# Allegro board GC3355 USB_pcb_V1.brd
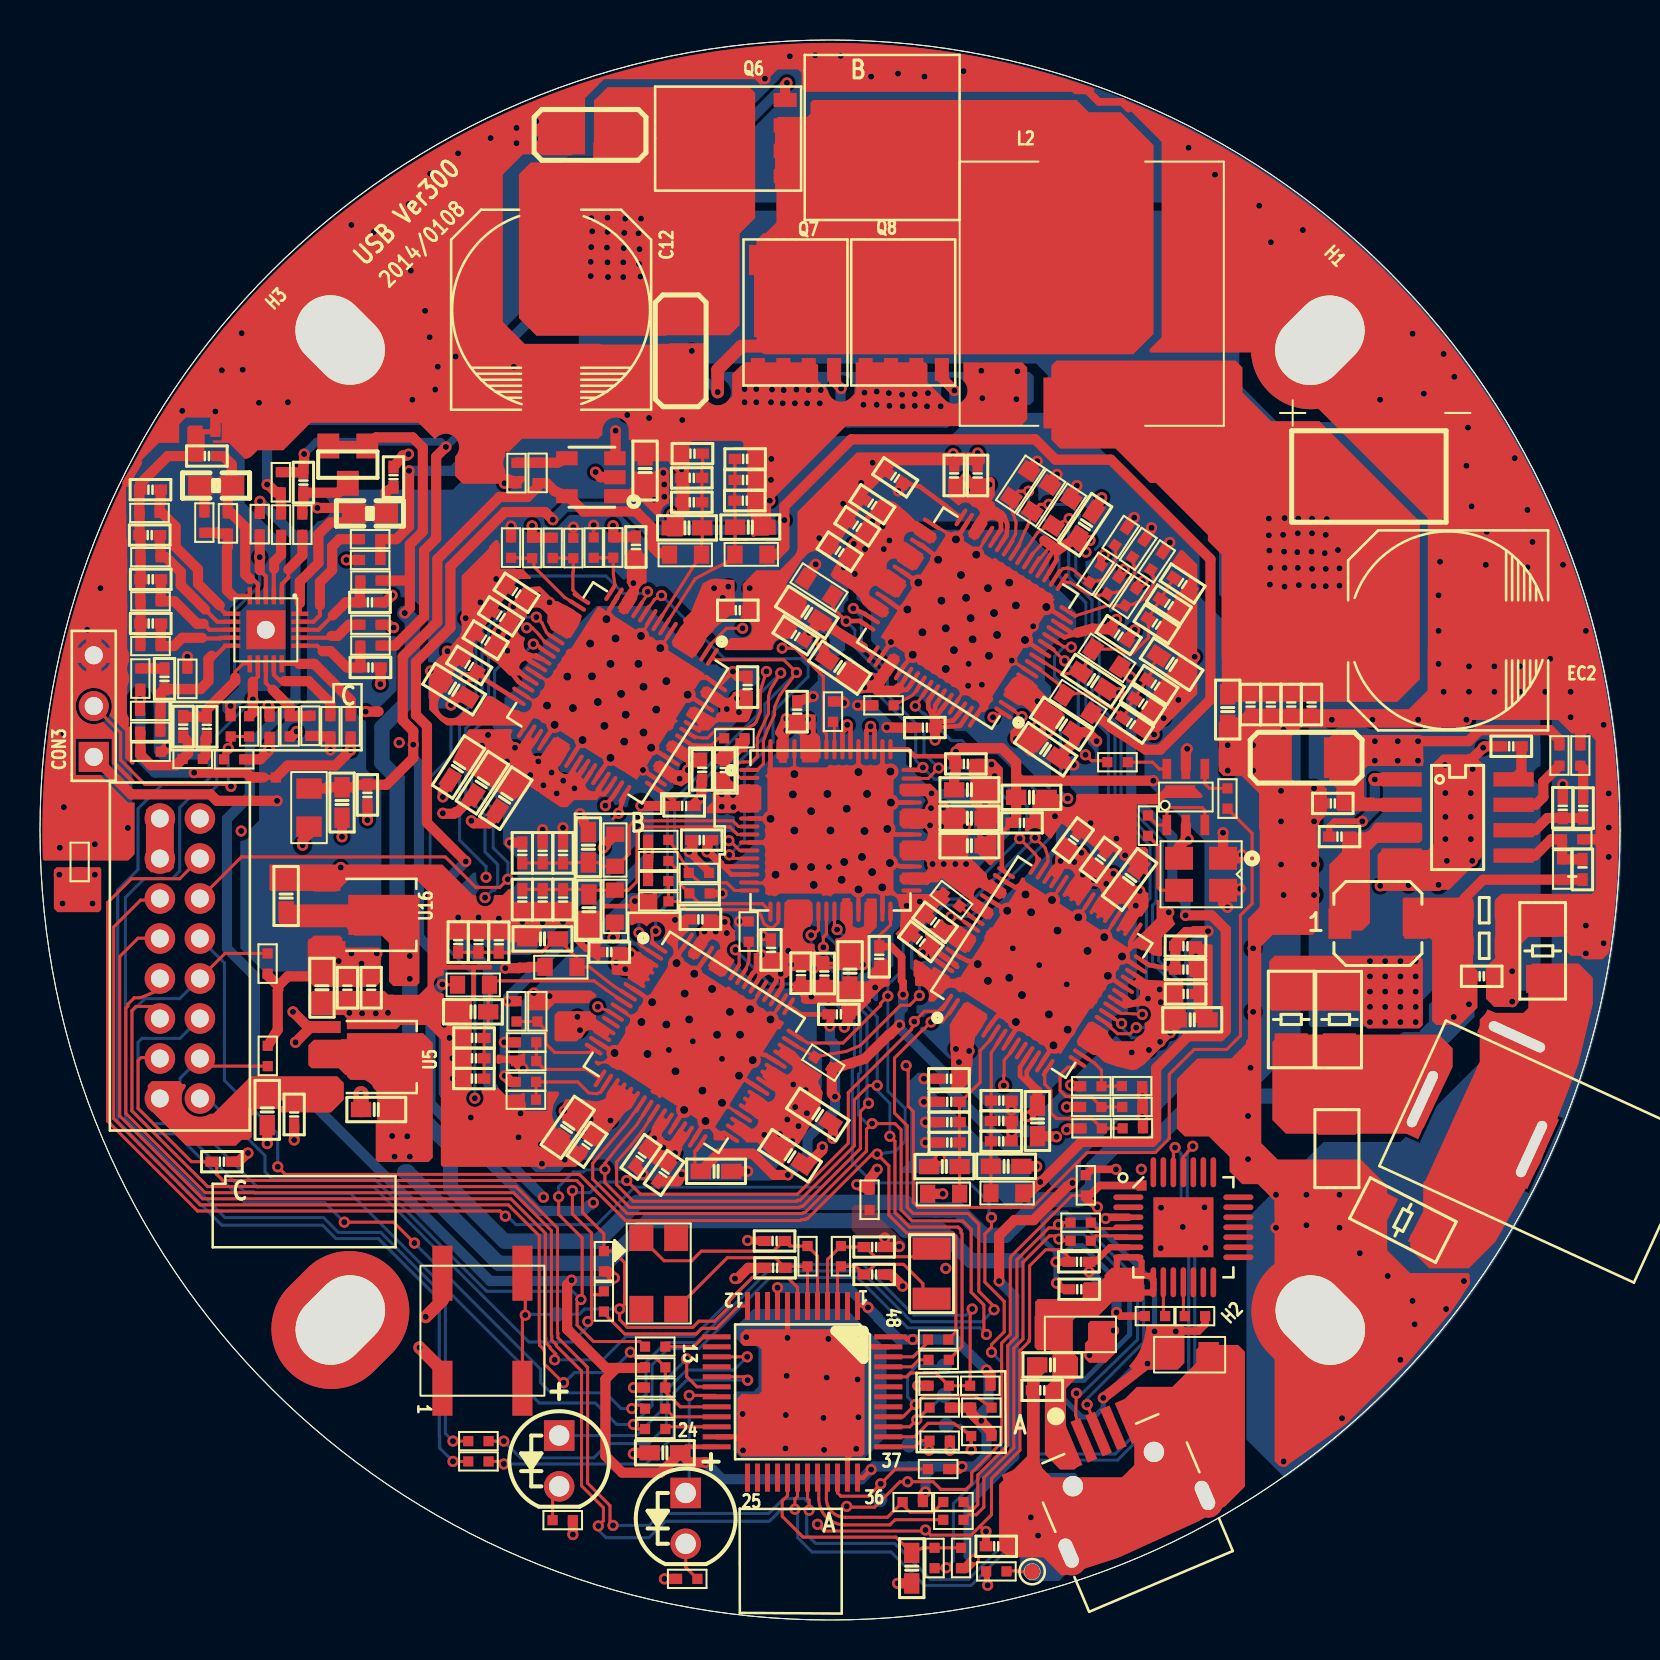
[diagram p0: board, top side]
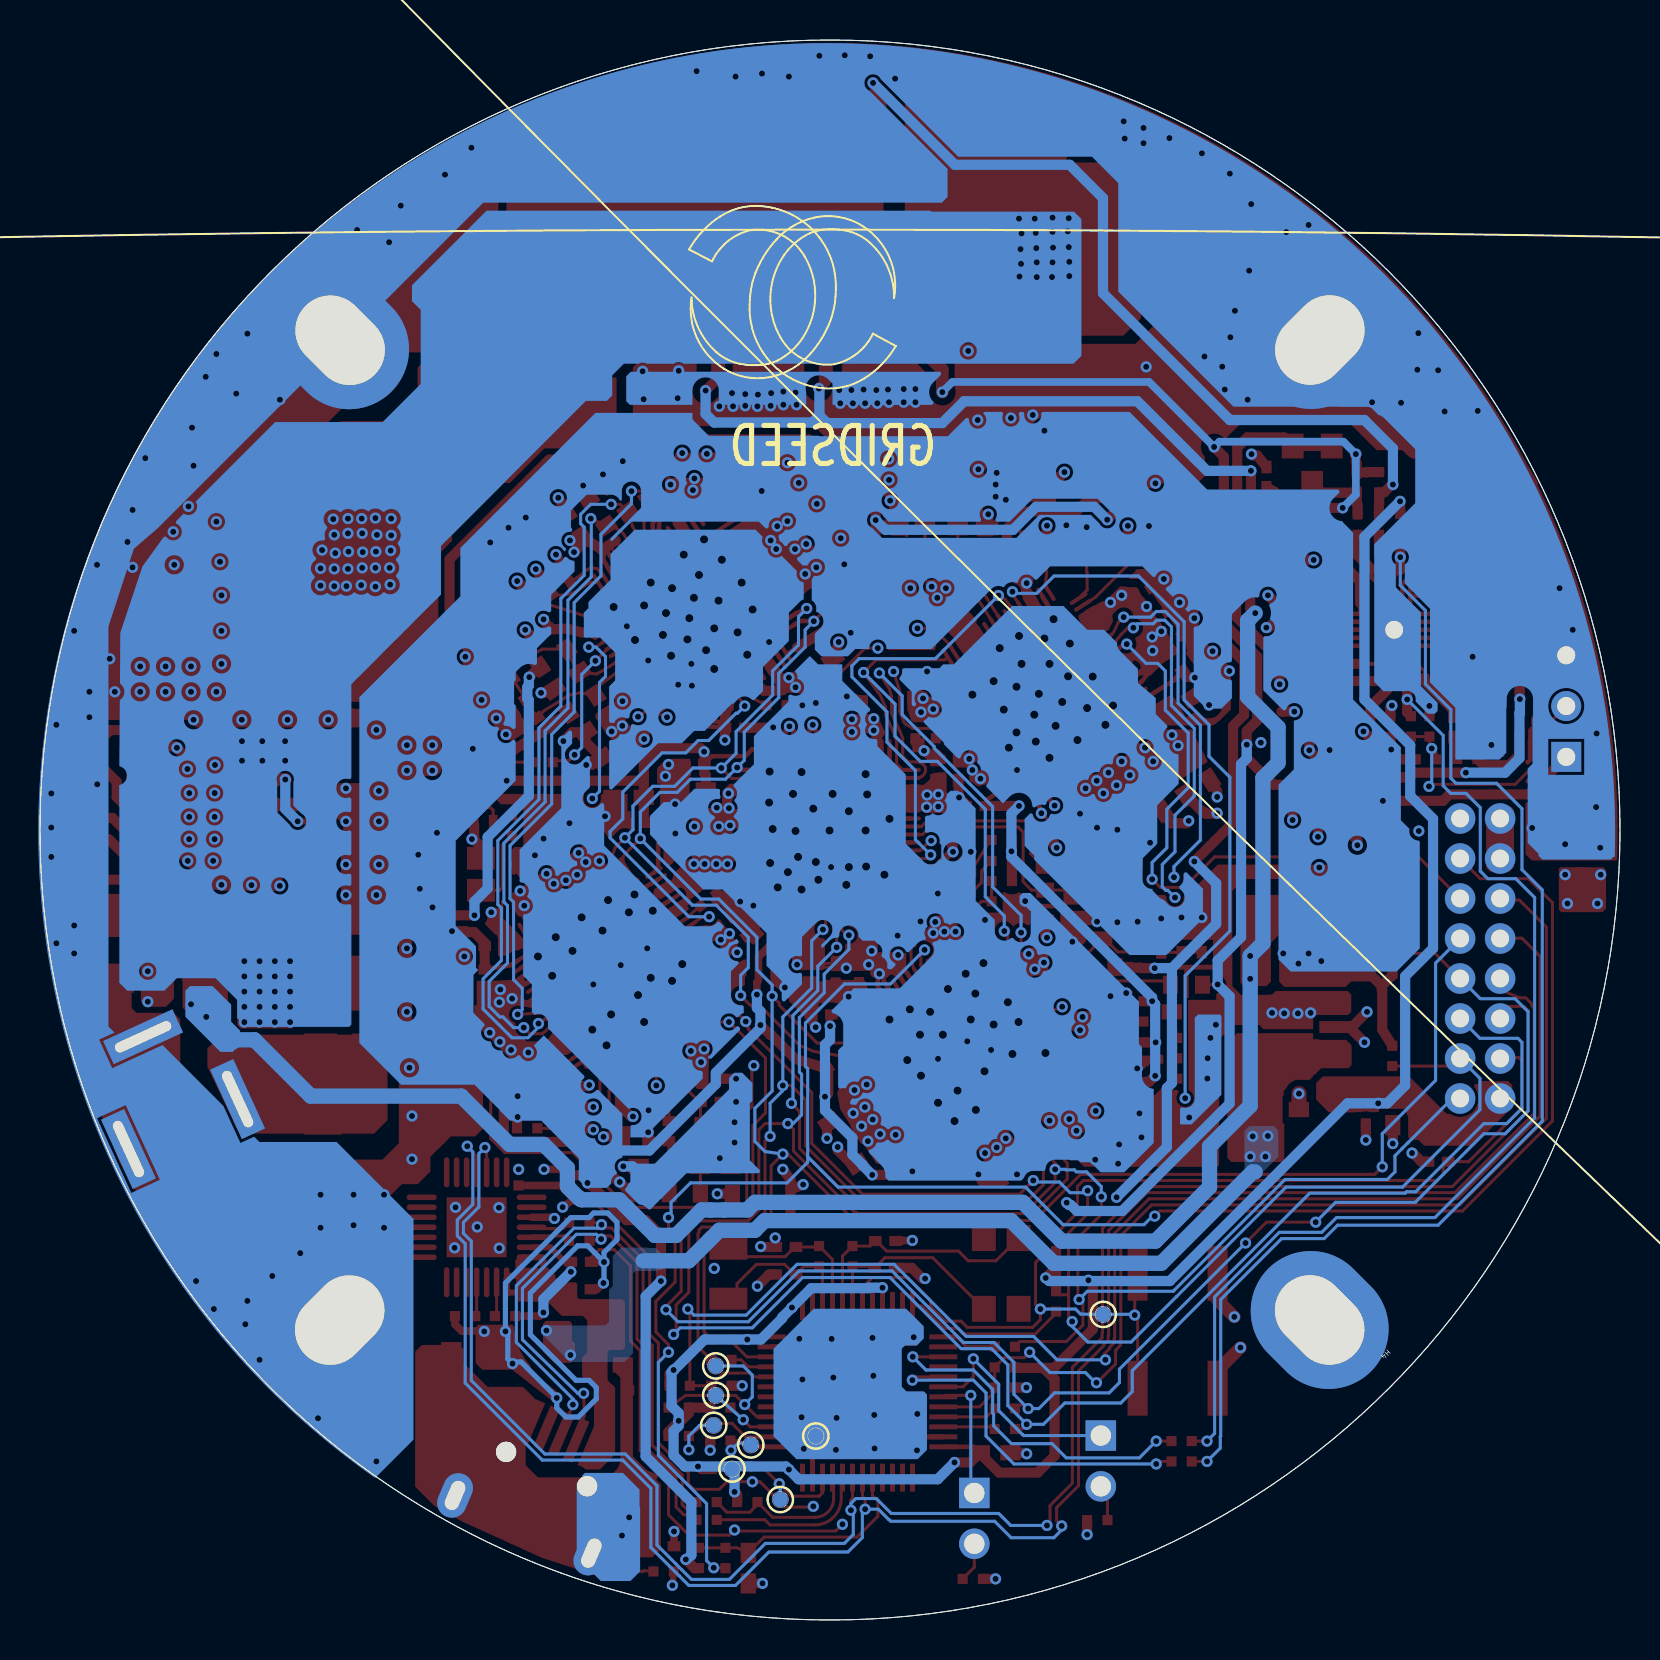
[diagram p1: board, bottom side, seen from below]

Outline 79 x 79 mm; copper layers: TOP, GND, VCC, BOTTOM. Coordinates in mm from the lower left corner of the outline.
Outline path: circle c39.5,39.5 r39.5 ; circle c39.5,39.5 r39.5

## Design rules (mm)
net group 4MIL: nets DGND

## Placement (name value [footprint] x y rotation side)
C8  0.1uF  [C0402]  13.17 56.87 90 top
C9  10uF/16v  [C1206]  27.5 74.26 180 top
C10  10uF/16v  [C1206]  32.04 63.46 270 top
C11  3.3n  [C0402]  17.68 57.14 90 top
C12  220uf/25v  [CES10]  25.56 65.51 270 top
C13  0.1uf  [C0402]  61.54 45.77 270 top
C14  10u/6.3V  [C0603]  59.39 45.52 270 top
C15  0.1uf  [C0402]  60.53 45.77 270 top
C16  1000pF  [C0402]  63.58 45.77 270 top
C17  1000pF  [C0402]  62.56 45.77 270 top
C18  22pF  [C0402]  41.71 18.65 180 top
C19  22pF  [C0402]  41.71 17.28 180 top
C20  22pF  [C0402]  36.75 17.61 0 top
C21  22pF  [C0402]  36.73 18.95 0 top
C22  4.7uF  [C0603]  11.36 25.51 270 top
C23  0.1uF  [C0402]  12.71 25.28 270 top
C24  4.7uF  [C0603]  31.24 8.36 180 top
C25  10u/6.3V  [C0603]  50.62 12.75 0 top
C29  4.7uF  [C0603]  16.82 25.52 180 top
C30  NC  [C0402]  31.21 22.36 55.2 top
C31  1u  [C0402]  16.52 47.63 0 top
C32  0.1uF  [C0402]  50.11 11.48 0 top
C33  0.1uF  [C0603]  43.59 2.59 270 top
C34  2.2nF  [C0402]  6.23 47.06 90 top
C35  20nF  [C0402]  8.34 58.2 0 top
C36  10n  [C0402]  8.34 44.66 90 top
C37  33P  [C0402]  7.16 44.67 270 top
C38  NC  [C0402]  5.52 56.52 0 top
C39  1uF  [C0402]  16.5 50.88 0 top
C40  NC  [C0402]  5.48 54.25 0 top
C41  NC  [C0402]  5.54 52.04 0 top
C42  220uF  [D-CASE-D4D]  66.44 57.18 0 top
C43  NC  [C0402]  5.54 49.83 0 top
C44  0.1uF  [C0402]  47.81 3.69 0 top
C88  43pF  [C0402]  55.77 46.75 326.9 top
C89  2.2uF  [C0603]  56.58 47.79 326.8 top
C90  10uF  [C0603]  38.34 50.39 147.3 top
C91  91pF  [C0402]  55.15 45.8 326.4 top
C92  22pF  [C0402]  54.55 44.82 326.1 top
C93  43pF  [C0402]  56.45 50.77 326.9 top
C94  2.2uF  [C0603]  52.66 46.97 326.6 top
C95  91pF  [C0402]  55.83 49.79 327 top
C96  22pF  [C0402]  57.13 51.82 326.8 top
C97  0.1uF  [C0402]  49.1 39.86 0 top
C107  0.1uF  [C0402]  42.76 57.13 146.4 top
C109  10uF  [C0603]  39.99 47.62 145.6 top
C110  10uF  [C0603]  51.08 44.81 326.3 top
C111  10uF  [C0603]  50.28 43.53 325.6 top
C112  0.1uF  [C0402]  41.62 55.79 146.7 top
C113  0.1uF  [C0402]  40.86 54.69 146.7 top
C114  0.1uF  [C0402]  45.71 57.23 90 top
C116  0.1uF  [C0402]  46.88 57.23 89.9 top
C117  0.1uF  [C0402]  39.98 53.42 146.6 top
C118  0.1uF  [C0402]  44.24 44.62 180.3 top
C119  10uF  [C0603]  52.27 54.77 56.5 top
C120  43pF  [C0402]  26.15 38.36 90 top
C121  0.1uF  [C0402]  9.09 22.91 0 top
C122  2.2uF  [C0603]  27.42 38.64 90 top
C123  10uF  [C0603]  46.47 41.51 0 top
C124  91pF  [C0402]  25.13 38.36 90 top
C125  22pF  [C0402]  24.12 38.36 90 top
C126  43pF  [C0402]  25.13 36.02 270 top
C128  2.2uF  [C0603]  27.45 35.51 270 top
C129  91pF  [C0402]  26.15 36.02 270 top
C130  22pF  [C0402]  24.12 36.02 270 top
C131  0.1uF  [C0402]  41.96 33.16 270 top
C132  0.1uF  [C0402]  46.29 42.8 0 top
C133  10uF  [C0603]  46.47 40.09 0 top
C134  10uF  [C0603]  46.47 38.72 0 top
C135  10uF  [C0603]  40.5 32.44 270 top
C136  0.1uF  [C0402]  53.93 49.25 326.9 top
C137  0.1uF  [C0402]  34.24 42.5 90 top
C138  0.1uF  [C0402]  33.08 38.99 180 top
C139  0.1uF  [C0402]  39.22 32.32 270 top
C140  0.1uF  [C0402]  38.05 32.34 270 top
C141  0.1uF  [C0402]  37.86 45.42 90 top
C143  43pF  [C0402]  35.26 58.06 0.1 top
C144  2.2uF  [C0603]  35.52 54.64 0.1 top
C145  10uF  [C0603]  20.71 46.54 148.5 top
C146  91pF  [C0402]  35.24 55.97 0.1 top
C147  22pF  [C0402]  35.25 57 0.1 top
C148  43pF  [C0402]  32.59 55.89 180.1 top
C149  2.2uF  [C0603]  32.35 54.61 180 top
C150  91pF  [C0402]  32.62 58.32 180 top
C151  22pF  [C0402]  32.59 57.11 180.3 top
C152  0.1uF  [C0402]  32.21 40.7 359.8 top
C153  0.1uF  [C0402]  21.46 47.73 148.4 top
C154  10uF  [C0603]  20.93 42.65 237 top
C155  10uF  [C0603]  22.11 41.87 237 top
C156  10uF  [C0603]  23.28 41.09 237 top
C157  0.1uF  [C0402]  33.11 42.51 269.9 top
C158  0.1uF  [C0402]  23.04 50.18 147.1 top
C159  0.1uF  [C0402]  22.28 49 148.4 top
C160  0.1uF  [C0402]  23.83 51.36 146.7 top
C161  0.1uF  [C0402]  35.38 46.65 89.9 top
C162  0.1uF  [C0402]  34.89 50.49 0.1 top
C163  0.47uF  [C0402]  16.56 31.61 90 top
C164  43pF  [C0402]  45.46 24.89 180.1 top
C174  2.2uF  [C0603]  45.22 22.67 180.1 top
C175  10uF  [C0603]  49.57 41.13 359.9 top
C176  91pF  [C0402]  45.47 23.88 180.1 top
C177  22pF  [C0402]  45.46 25.91 180.1 top
C178  43pF  [C0402]  48.06 23.94 359.9 top
C179  2.2uF  [C0603]  48.31 22.68 359.9 top
C180  91pF  [C0402]  48.06 24.95 359.9 top
C181  22pF  [C0402]  48.06 25.97 359.9 top
C182  0.1uF  [C0402]  57.27 32.52 359.8 top
C183  0.1uF  [C0402]  57.27 33.69 359.6 top
C184  10uF  [C0603]  54.49 37.03 53.6 top
C185  10uF  [C0603]  57.61 30.01 0.1 top
C186  10uF  [C0603]  49.87 24.95 270 top
C187  0.1uF  [C0402]  45.45 27.06 180.1 top
C188  0.1uF  [C0402]  44.76 34.88 143.2 top
C195  0.1uF  [C0402]  44.04 33.93 143 top
C196  0.1uF  [C0402]  51.66 38.99 53.6 top
C197  0.1uF  [C0402]  53.02 38.03 53.6 top
C198  0.1uF  [C0402]  57.28 31.3 360 top
C199  10nF  [C0402]  64.97 39.17 0 top
C200  15pF  [C0402]  77.12 37.53 270 top
C201  22uF  [C0805]  72.21 33.71 0 top
C202  0.1uF  [C0402]  73.56 43.68 180 top
C203  22uF  [C0805]  72.21 35.49 0 top
C204  0.1uF  [C0402]  72.09 32.19 0 top
C205  22uF  [C1206]  63.31 43.12 0 top
C206  0.1uF  [C0402]  64.64 40.83 180 top
C207  3.9nF  [C0402]  77.16 40.6 90 top
C210  NC  [C0402]  76.14 40.61 90 top
C263  43pF  [C0402]  21.93 33.89 89.8 top
C264  2.2uF  [C0603]  25.12 34.05 179.9 top
C265  10uF  [C0603]  33.8 22.43 359.9 top
C266  91pF  [C0402]  22.94 33.89 89.8 top
C267  22pF  [C0402]  20.91 33.9 89.8 top
C268  43pF  [C0402]  21.7 28.09 179.8 top
C269  2.2uF  [C0603]  21.65 30.41 179.8 top
C270  91pF  [C0402]  21.7 29.1 179.8 top
C271  22pF  [C0402]  21.7 27.07 179.8 top
C272  0.1uF  [C0402]  39.94 30.28 0 top
C273  0.1uF  [C0402]  37.78 49.23 147.5 top
C274  10uF  [C0603]  26.38 24.63 235.4 top
C275  10uF  [C0603]  38.89 25.28 326.8 top
C276  10uF  [C0603]  37.5 23.21 326.8 top
C277  0.1uF  [C0402]  33.02 35.03 180 top
C278  0.1uF  [C0402]  28.47 33.39 179.8 top
C279  0.1uF  [C0402]  29.8 53.65 90.1 top
C280  0.1uF  [C0402]  27.35 23.76 234.9 top
C281  0.1uF  [C0402]  36.55 33.51 90 top
C282  0.1uF  [C0402]  30.05 23.16 234.9 top
C283  4.7U-06  [C0603]  30.25 57.47 90 top
C291  10uF  [C0603]  14.1 31.61 270 top
C292  0.1uF  [C0402]  15.37 31.61 270 top
C293  10uF  [C0603]  12.31 36.2 90 top
C294  1uF  [C0402]  51.95 17.91 180 top
C295  10uF  [C0603]  15.1 40.87 270 top
C296  0.1uF  [C0402]  16.37 41.26 270 top
C297  1uF  [C0402]  51.96 16.54 180 top
CON2  8pin  [CON8X2-2M0]  5.99 33.07 90 top
CON3  3pin  [HEADER3PIN]  2.69 43.16 90 top
D2  BAT54C/SOT  [SOT23-3]  15.39 57.77 180 top
EC2  1500u/6.3V  [CES10]  70.41 49.48 0 top
FB22  300ohm@100MHz,1.5A  [FB0805]  13.45 40.62 270 top
FB23  300ohm@100MHz,3A  [R1206]  64.97 30.03 90 top
FB24  300ohm@100MHz,3A  [R1206]  62.56 30.03 90 top
FB25  300ohm@100MHz,1.5A  [FB0805]  52.02 14.28 0 top
FB26  300ohm@100MHz,1.5A  [FB0805]  57.48 13.27 180 top
FB27  300ohm@100MHz,3A  [R1206]  75.13 33.46 270 top
FB28  300ohm@100MHz,3A  [R1206]  68.15 19.99 332.9 top
GND  T_POINT_R  [TP0M5C]  40.21 9.2 180 bottom
H1  hole  [THC6M0D3M5]  64 63.99 315 top
H2  hole  [THC6M0D3M5]  64.01 15 45 top
H3  hole  [THC6M0D3M5]  15.01 64 45 top
H4  hole  [THC6M0D3M5]  15.02 15 315 bottom
J1  SMCB-056508LB  [USB_MN5-004]  53.67 7.55 202.9 top
J2  DS-008  [DS-0008]  72.85 26.98 335.4 top
JTCK  T_POINT_R  [TP0M5C]  43.46 8.75 0 bottom
JTDI  T_POINT_R  [TP0M5C]  45.31 9.73 0 bottom
JTDO  T_POINT_R  [TP0M5C]  45.21 11.23 0 bottom
JTMS  T_POINT_R  [TP0M5C]  41.99 6.02 180 bottom
L2  1u  [LS2_1335]  52.59 66.32 270 top
L3  1uH_3A  [CHOKE_40]  66.9 34.82 0 top
LED2  -  [LED]  25.96 7.95 0 top
LED3  -  [LED]  32.28 5.08 0 top
M1  GC3355  [QFN24_4X4MM_SLUG]  46.38 50.09 147.3 top
M2  GC3355  [QFN24_4X4MM_SLUG]  39.52 39.48 0 top
M3  GC3355  [QFN24_4X4MM_SLUG]  28.88 46.36 237.5 top
M4  GC3355  [QFN24_4X4MM_SLUG]  50.09 32.64 57.2 top
M5  GC3355  [QFN24_4X4MM_SLUG]  32.72 28.88 327.4 top
NJTRST  T_POINT_R  [TP0M5C]  45.21 12.7 0 bottom
Q6  09N03  [LFPAK]  34.46 74.07 180 top
Q7  09N03  [LFPAK]  37.78 65.33 90 top
Q8  09N03  [LFPAK]  43.16 65.33 90 top
R1  1R  [RC0603]  51.89 45.8 146.8 top
R2  1R  [RC0603]  53.33 48.1 146.5 top
R8  2.2  [R0603]  16.5 55.33 0 top
R9  681R  [R0402]  16.52 48.72 180 top
R10  0  [R0402]  13.12 54.77 270 top
R14  0  [R0402]  12.05 54.77 90 top
R15  0  [R0402]  16.51 54.04 0 top
R21  1k  [R0402]  26.14 4.99 0 top
R22  1k  [R0402]  32.36 2.06 180 top
R23  0r  [R0402]  30.76 13.67 0 top
R24  0r  [R0402]  28.19 15.93 270 top
R25  0r  [R0402]  30.76 9.55 0 top
R26  0r  [R0402]  30.76 10.57 0 top
R27  0r  [R0402]  44.91 14.02 0 top
R28  0r  [R0402]  44.93 13.01 0 top
R29  100R  [R0402]  44.73 3.1 270 top
R30  10K  [R0402]  46.05 3.1 90 top
R32  1M  [R0402]  40.05 18.19 270 top
R33  10K  [R0402]  28.19 17.94 270 top
R34  NC  [R0402]  47.02 11.71 0 top
R35  10K  [R0402]  44.93 11.71 180 top
R36  3K  [R0402]  15.53 44.68 270 top
R37  1M  [R0402]  38.38 18.19 90 top
R38  10K  [R0402]  47.07 10.62 180 top
R39  10K  [R0402]  44.98 10.62 0 top
R40  10K  [R0402]  47.07 9.2 0 top
R41  0  [R0402]  9.4 54.83 90 top
R42  20K  [R0402]  7.63 43.05 180 top
R43  NC  [R0402]  7.37 47.06 90 top
R44  RS  [R-0402_S]  11.29 42.13 0 top
R45  2K  [R0402]  5.51 45.46 180 top
R46  0R  [R-0402_S]  8.27 59.41 0 top
R47  10K  [R0402]  44.91 7.55 0 top
R48  100K  [R0402]  10.99 54.79 270 top
R49  10K  [R0402]  47.82 2.43 0 top
R50  33k  [R0402]  16.52 49.76 180 top
R51  10K  [R0402]  44.98 8.97 180 top
R52  0  [R0402]  5.02 47.07 270 top
R53  2.2K  [RC0603]  50.06 56.09 236.6 top
R54  2.2K  [RC0603]  51.12 55.38 236.6 top
R55  1R  [RC0603]  28.77 38.49 270 top
R56  1R  [RC0603]  28.74 35.69 90 top
R57  10K  [R0402]  30.76 12.63 180 top
R58  NC  [R0402]  5.51 44.41 0 top
R59  0  [R0402]  5.53 43.41 0 top
R60  10K  [R0402]  30.76 11.62 180 top
R61  1R  [RC0603]  35.55 53.27 180.1 top
R62  1R  [RC0603]  32.28 53.27 0.1 top
R63  30k  [R0402]  5.53 50.93 180 top
R64  33k  [R0402]  5.53 53.14 180 top
R65  2.2  [R0402]  16.52 51.97 180 top
R66  36k  [R0402]  5.47 55.35 180 top
R67  1R  [RC0603]  45.18 21.31 0.1 top
R68  1R  [RC0603]  48.34 21.34 179.9 top
R69  nc  [R0402]  54.04 54.15 56.6 top
R70  nc  [R0402]  54.91 53.56 55.7 top
R71  nc  [R0402]  55.83 52.93 56 top
R72  4.7k  [R0402]  52.77 52.31 236.5 top
R73  1R  [RC0603]  26.05 32.65 0 top
R74  1R  [RC0603]  21.68 31.76 0 top
R75  4.7k  [R0402]  53.65 51.73 235.6 top
R76  4.7k  [R0402]  54.54 51.14 236.6 top
R77  nc  [R0402]  30.91 37.95 180.1 top
R78  100k  [R0402]  11.39 28.2 90 top
R79  100k  [R0402]  11.38 32.82 270 top
R80  0r  [R0402]  21.92 7.93 180 top
R81  4.7k  [R0402]  30.91 39.01 180 top
R82  4.7k  [R0402]  30.91 35.93 0 top
R83  4.7k  [R0402]  32.98 36.33 179.9 top
R84  nc  [R0402]  32.95 37.35 180 top
R85  0r  [R0402]  21.92 8.94 180 top
R86  10K  [R0402]  55.75 15.2 0 top
R87  nc  [R0402]  30.91 36.95 180 top
R88  4.7k  [R0402]  26.67 53.6 90 top
R89  nc  [R0402]  27.68 53.62 90 top
R90  4.7k  [R0402]  24.61 53.6 270.1 top
R93  nc  [R0402]  25.64 53.61 269.9 top
R94  4.7k  [R0402]  28.67 53.62 269.9 top
R95  nc  [R0402]  23.55 53.62 90 top
R96  4.7k  [R0402]  54.62 25.65 0.1 top
R97  2.2K  [RC0603]  49.02 56.78 236.4 top
R98  2.2K  [RC0603]  38.97 51.63 327.1 top
R99  4.7k  [R0402]  42.18 45.73 180 top
R100  4.7k  [R0402]  54.64 24.59 0 top
R101  4.7k  [R0402]  52.57 26.69 360 top
R102  nc  [R0402]  52.56 25.65 359.9 top
R103  nc  [R0402]  52.58 24.58 0 top
R104  nc  [R0402]  54.6 26.7 360 top
R105  10K  [R0402]  39.17 27.87 327 top
R106  10K  [R0402]  57.75 15.19 180 top
R107  4.7k  [R0402]  39.65 45.42 90 top
R108  4.7k  [R0402]  34.72 44.09 0.1 top
R109  4.7k  [R0402]  45.57 36.01 142.7 top
R110  4.7k  [R0402]  35.43 34.42 90 top
R113  100K  [R0402]  75.97 43.22 270 top
R115  NC  [R-0603]  8.8 56.72 0 top
R116  NC  [R0402]  8.22 54.87 90 top
R117  NC  [R0402]  12.04 56.89 90 top
R118  NC  [R0402]  16.51 53 180 top
R119  40.2K_1%  [R0402]  76.11 37.53 90 top
R120  nc  [R0402]  24.31 28.88 180 top
R121  nc  [R0402]  23.83 30.43 90 top
R122  nc  [R0402]  24.3 26.02 0 top
R123  4.7k  [R0402]  24.31 27.94 0 top
R124  4.7k  [R0402]  24.87 30.43 270 top
R125  4.7k  [R0402]  24.3 26.9 180 top
R126  10k 1%  [R0402]  76.61 39.03 0 top
R127  10k  [R0402]  77.02 43.22 270 top
R139  27k  [R0402]  5.53 48.7 180 top
R183  22R  [R0402]  45.67 5.01 0 top
R184  22R  [R0402]  45.67 5.9 0 top
R185  1.5k  [R0402]  43.64 5.9 180 top
R186  0R  [R0402]  1.98 37.9 90 top
R187  0R  [R0402]  41.48 21.01 90 top
R188  0R  [R0402]  52.29 21.73 90 top
R189  22R  [R0402]  52.03 18.96 180 top
R190  22R  [R0402]  52.03 19.87 180 top
R211  3.65k-1-04  [R0402]  24.88 57.36 90 top
R212  10k-1-04  [R0402]  23.82 57.34 270 top
R330  1K  [R0402]  14.52 44.68 90 top
R331  10K  [R0402]  11.48 44.67 270 top
R332  1K  [R0402]  12.49 44.68 90 top
R333  nc  [R0402]  13.52 44.71 270 top
R336  1K  [R0402]  10.45 44.68 270 top
R337  nc  [R0402]  9.7 43.03 0 top
R338  nc  [R0402]  9.53 44.68 270 top
R343  0R  [R0402]  53.87 42.89 0 top
R344  0R  [R0402]  59.37 41.07 90 top
R345  0R  [R0402]  55.4 39.72 270 top
RST  T_POINT_R  [TP0M5C]  25.84 15.28 180 bottom
RTCK  T_POINT_R  [TP0M5C]  49.61 2.42 0 top
SW100  B3SL  [SW_B3SL-1022P]  22.12 14.46 270 top
T1  FANS  [SMD3215]  64.85 23.57 90 top
U1  GD32F103C8  [QFPS48_0D5_1D6]  38.13 11.41 180 top
U2  uP1509  [QFN3X3-20-0-4]  11.29 49.51 270 top
U3  cp2102  [QFN28-CP2102]  57.17 19.64 0 top
U5  AME8805AFET  [SOT_89_M]  16.14 28.15 0 top
U7  UP1707Q  [PSOP8]  68.08 42.03 0 top
U9  UP0111  [SOT23_5]  27.55 57.14 90 top
U16  AME8805AFET  [SOT_89_M]  16.12 35.26 0 top
U29  74HC2GU04  [SOT23-6]  57.29 41.15 0 top
VCC3V3  T_POINT_R  [TP0M5C]  44.4 7.55 180 bottom
X6  25M  [XTAL4_3P2X2P5_SMD]  58.05 37.29 180 top
Y2  32.768K  [SMD3215]  44.58 17.32 90 top
Y3  8M  [XS4_3225_1D0]  30.94 17.33 270 top

## Library data of the parts
C8 C11 C30 C31 C34-C43 = C0603
C9 C10 C13-C17 C25 = C0805
C12 EC2 = EC10
C18-C21 C23 C32 C44 = CAP-NP0603_0
C22 C24 C29 C33 = CAP-NP0805_0
C88-C97 C107 C109-C114 C116-C120 C122-C126 C128-C141 C143-C162 C164 C174-C188 C195-C198 C263-C282 C291-C297 = CAP_NP
C121 = 1uFCapacitor10V10%0402
C163 = CAP NP_0
C199-C207 C210 = CAP NP
C283 = C_2
CON2 = CON_DIP36_8
CON3 = CON_DIP36_6
D2 = BAT54C/SOT_7
FB22-FB28 = FERRITE BEAD: room: OCD_MICJACK
GND JTCK JTDI JTDO JTMS NJTRST RST RTCK VCC3V3 = T_POINT_R
H1-H4 = Z_0
J1 = MIRCOUSB-9_0
J2 = DC-33_2
L2 = Inductor_Ring_Cube_0
L3 = CHOKE RF
LED2 LED3 = LED_2
M1-M5 = LAN8720A-QFN24_1
Q6-Q8 = NMOS_D_PPAK_2
R1 R2 R53-R56 R61 R62 R67-R77 R81-R84 R87-R90 R93-R105 R107-R110 R120-R125 = RES: tolerance: 5%
R8-R10 R14 R15 R36 R41-R43 R45 R48 R50 R52 R58 R59 R63-R66 R115-R118 R139 = R0603
R21-R30 R32-R35 R37-R40 R47 R49 R51 R57 R60 R78-R80 R85 R86 R106 = R0603_0
R44 R46 = RS
R113 R119 R126 R127 R330-R333 R336-R338 R343-R345 = R
R183-R190 = R1005_0
R211 R212 = R_10
SW100 = Switch_Pushbuttonsmd
T1 Y2 = CRYSTAL_0
U1 = VC0355TLN_1
U2 = uP6203_QFN24_1
U3 = uP6203_QFN24_0
U5 = AME8805AEFT_0
U7 = MP1497_3
U9 = SN74AHCT1G125_0: room: OCD_CRT
U16 = FLASHMP3_5
U29 = PCF8574_P_0
X6 = SMD2520
Y3 = CRYSTAL_1

## Footprints (pads in the part's own frame, mm; a bottom-side part is the same pattern mirrored in y, then rotated)
C0402
  rect 0.635x0.508 smd: 1(-0.508,0) 2(0.508,0)
C0603
  rect 1.016x0.762 smd: 1(-0.762,0) 2(0.762,0)
C0805
  oval 0.889x1.524 smd: 1(-0.965,0) 2(0.965,0)
C1206
  rect 1.524x2.032 smd: 1(-1.651,0) 2(1.651,0)
CES10
  rect 4.4x2.6 smd: 1(-4.2,0) 2(4.2,0)
CHOKE_40
  rect 1.143x1.524 smd: 1(-1.9,0) 2(1.9,0)
CON8X2-2M0
  round 1.524 hole 0.889: 1(-7,0) 2(-5,0) 3(-3,0) 4(-1,0) 5(1,0) 6(3,0) 7(5,0) 8(7,0) 9(-7,-2) 10(-5,-2) 11(-3,-2) 12(-1,-2) 13(1,-2) 14(3,-2) 15(5,-2) 16(7,-2)
D-CASE-D4D
  rect 1.829x2.845 smd: 1(-3.861,0) 2(3.861,0)
DS-0008
  rect 1.27x3.81 hole 0.508x3.048: 1(-3,-2.4) 2(3,-2.4)
  rect 3.81x1.27 hole 3.048x0.508: 3(0,2.4)
FB0805
  rect 1.016x1.27 smd: 1(-0.953,0) 2(0.953,0)
HEADER3PIN
  rect 1.5x1.5 hole 0.9: 1(0,0)
  round 1.5 hole 0.9: 2(2.54,0) 3(5.08,0)
LED
  rect 1.524x1.524 hole 1.016: A(0,1.27)
  round 1.524 hole 1.016: K(0,-1.27)
LFPAK
  rect 1.15x0.7 smd: 1(-2.801,1.88) 2(-2.801,0.61) 3(-2.801,-0.66) 4(-2.801,-1.93)
  rect 3.1x4.2 smd: 5(0.374,-0.025)
  rect 1.5x4.7 smd: 6(2.674,-0.025)
LS2_1335
  rect 2.54x4.826 smd: 1(-5.461,0) 2(5.461,0)
PSOP8
  rect 2.007x0.711 smd: 1(0,0) 2(0,-1.27) 3(0,-2.54) 4(0,-3.81) 5(5.6,-3.81) 6(5.6,-2.54) 7(5.6,-1.27) 8(5.6,0)
  rect 2.007x3.023 smd: 9(2.8,-1.9)
QFN3X3-20-0-4
  rect 0.85x0.225 smd: 1(-1.702,0.8) 2(-1.702,0.4) 3(-1.702,0) 4(-1.702,-0.4) 5(-1.702,-0.8) 11(1.702,-0.8) 12(1.702,-0.4) 13(1.702,0) 14(1.702,0.4) 15(1.702,0.8)
  rect 0.225x0.85 smd: 6(-0.8,-1.702) 7(-0.4,-1.702) 8(0,-1.702) 9(0.4,-1.702) 10(0.8,-1.702) 16(0.8,1.702) 17(0.4,1.702) 18(0,1.702) 19(-0.4,1.702) 20(-0.8,1.702)
  rect 1.575x1.575 hole 0.889: 21(0,0)
QFN24_4X4MM_SLUG
  oval 1.016x0.203 smd: 1(-4.06,3.03) 2(-4.06,2.63) 3(-4.06,2.2) 4(-4.06,1.8) 5(-4.06,1.4) 6(-4.06,1) 7(-4.06,0.6) 8(-4.06,0.2) 9(-4.06,-0.2) 10(-4.06,-0.6) 11(-4.06,-1) 12(-4.06,-1.4) 13(-4.06,-1.8) 14(-4.06,-2.2) 15(-4.06,-2.6) 16(-4.06,-3) 33(4.06,-3) 34(4.06,-2.6) 35(4.06,-2.2) 36(4.06,-1.8) 37(4.06,-1.4) 38(4.06,-1) 39(4.06,-0.6) 40(4.06,-0.2) 41(4.06,0.2) 42(4.06,0.6) 43(4.06,1) 44(4.06,1.4) 45(4.06,1.8) 46(4.06,2.2) 47(4.06,2.6) 48(4.06,3.03)
  oval 0.203x1.016 smd: 17(-3,-4.06) 18(-2.6,-4.06) 19(-2.2,-4.06) 20(-1.8,-4.06) 21(-1.4,-4.06) 22(-1,-4.06) 23(-0.6,-4.06) 24(-0.2,-4.06) 25(0.2,-4.06) 26(0.6,-4.06) 27(1,-4.06) 28(1.4,-4.06) 29(1.8,-4.06) 30(2.2,-4.06) 31(2.6,-4.06) 32(3,-4.06) 49(3,4.06) 50(2.6,4.06) 51(2.2,4.06) 52(1.8,4.06) 53(1.4,4.06) 54(1,4.06) 55(0.6,4.06) 56(0.2,4.06) 57(-0.2,4.06) 58(-0.6,4.06) 59(-1,4.06) 60(-1.4,4.06) 61(-1.8,4.06) 62(-2.2,4.06) 63(-2.6,4.06) 64(-3,4.06)
  rect 6.299x6.299 smd: 65(0,0)
QFN28-CP2102
  oval 1.5x0.28 smd: 1(-2.75,1.5) 2(-2.75,1) 3(-2.75,0.5) 4(-2.75,0) 5(-2.75,-0.5) 6(-2.75,-1) 7(-2.75,-1.5) 15(2.75,-1.5) 16(2.75,-1) 17(2.75,-0.5) 18(2.75,0) 19(2.75,0.5) 20(2.75,1) 21(2.75,1.5)
  oval 0.28x1.5 smd: 8(-1.5,-2.75) 9(-1,-2.75) 10(-0.5,-2.75) 11(0,-2.75) 12(0.5,-2.75) 13(1,-2.75) 14(1.5,-2.75) 22(1.5,2.75) 23(1,2.75) 24(0.5,2.75) 25(0,2.75) 26(-0.5,2.75) 27(-1,2.75) 28(-1.5,2.75)
  rect 3x3 smd: 29(0,0)
  rect 0.508x0.508 smd: 30(-2.09,2.09)
QFPS48_0D5_1D6
  rect 0.25x1.4 smd: 1(-2.75,-4.29) 2(-2.25,-4.29) 3(-1.75,-4.29) 4(-1.25,-4.29) 5(-0.75,-4.29) 6(-0.25,-4.29) 7(0.25,-4.29) 8(0.75,-4.29) 9(1.25,-4.29) 10(1.75,-4.29) 11(2.25,-4.29) 12(2.75,-4.29) 25(2.75,4.29) 26(2.25,4.29) 27(1.75,4.29) 28(1.25,4.29) 29(0.75,4.29) 30(0.25,4.29) 31(-0.25,4.29) 32(-0.75,4.29) 33(-1.25,4.29) 34(-1.75,4.29) 35(-2.25,4.29) 36(-2.75,4.29)
  rect 1.4x0.25 smd: 13(4.29,-2.75) 14(4.29,-2.25) 15(4.29,-1.75) 16(4.29,-1.25) 17(4.29,-0.75) 18(4.29,-0.25) 19(4.29,0.25) 20(4.29,0.75) 21(4.29,1.25) 22(4.29,1.75) 23(4.29,2.25) 24(4.29,2.75) 37(-4.29,2.75) 38(-4.29,2.25) 39(-4.29,1.75) 40(-4.29,1.25) 41(-4.29,0.75) 42(-4.29,0.25) 43(-4.29,-0.25) 44(-4.29,-0.75) 45(-4.29,-1.25) 46(-4.29,-1.75) 47(-4.29,-2.25) 48(-4.29,-2.75)
R0402
  rect 0.508x0.508 smd: 1(-0.508,0) 2(0.508,0)
R0603
  rect 1.219x0.965 smd: 1(-0.787,0) 2(0.787,0)
R1206
  rect 1.397x1.651 smd: 1(-1.397,0) 2(1.397,0)
R-0402_S
  custom 1.27x0.508 smd: 1(-0.119,0)
  rect 0.508x0.508 smd: 2(0.5,0)
R-0603
  rect 1.219x0.965 smd: 1(-0.787,0) 2(0.787,0)
RC0603
  rect 0.76x0.9 smd: 1(-0.8,0) 2(0.8,0)
SMD3215
  rect 1.1x1.9 smd: 1(-1.25,0) 2(1.25,0)
SOT23-3
  rect 1.092x1.245 smd: 1(-0.975,-0.932) 2(0,0.932) 3(0.975,-0.932)
SOT23-6
  rect 0.432x1.016 smd: 1(-0.95,-1.4) 2(0,-1.4) 3(0.95,-1.4) 4(0.95,1.4) 5(0,1.4) 6(-0.95,1.4)
SOT23_5
  rect 0.701x1.069 smd: 1(-0.95,-1.199) 2(0,-1.199) 3(0.95,-1.199) 4(0.95,1.199) 5(-0.95,1.199)
SOT_89_M
  rect 1.6x0.6 smd: 1(-1.9,1.5) 3(-1.9,-1.5)
  rect 2x0.7 smd: 2(-1.7,0)
  rect 3.4x2 smd: 4(1,0)
SW_B3SL-1022P
  rect 2.75x1 smd: 1(2.875,-2) 2(-2.875,-2) 3(2.875,2) 4(-2.875,2)
THC6M0D3M5
  oval 6x7.264 hole 3.5x4.877: 1(0,0)
TP0M5C
  round 0.762 smd: 1(0,0)
USB_MN5-004
  round 1.016 hole 1.016 unplated: (-2.2,0) (2.2,0)
  rect 0.508x2.21 smd: 1(1.6,-1.9) 2(0.8,-1.9) 3(0,-1.9) 4(-0.8,-1.9) 5(-1.6,-1.9)
  rect 2.007x2.007 smd: 6(4.26,-0.9) 7(-4.24,-0.9)
  oval 1.473x2.286 hole 0.711x1.524: 8(3.7,3) 9(-3.7,3)
XS4_3225_1D0
  rect 1.3x1.2 smd: 1(-1.77,-0.87) 2(1.77,-0.87) 3(1.77,0.87) 4(-1.77,0.87)
XTAL4_3P2X2P5_SMD
  rect 1.397x1.143 smd: 1(-1.1,-0.8) 2(1.1,-0.8) 3(1.1,0.8) 4(-1.1,0.8)

## Nets
AVDD_PLL: FB22.2 R1.1 R55.1 R61.1 R67.1 R73.1
DGND: C9.2 C10.2 C11.2 C12.2 C13.2 C14.2 C15.2 C16.2 C17.2 C30.1 C39.2 C42.2 C88.2 C89.2 C90.2 C91.2 C92.2 C93.2 C94.2 C95.2 C96.2 C97.2 C107.2 C109.2 C110.2 C111.2 C112.2 C113.2 C114.2 C116.2 C117.2 C118.2 C119.2 C120.2 C122.2 C123.2 C124.2 C125.2 C126.2 C128.2 C129.2 C130.2 C131.2 C132.2 C133.2 C134.2 C135.2 C136.2 C137.2 C138.2 C139.2 C140.2 C141.2 C143.2 C144.2 C145.2 C146.2 C147.2 C148.2 C149.2 C150.2 C151.2 C152.2 C153.2 C154.2 C155.2 C156.2 C157.2 C158.2 C159.2 C160.2 C161.2 C162.2 C163.1 C164.2 C174.2 C175.2 C176.2 C177.2 C178.2 C179.2 C180.2 C181.2 C182.2 C183.2 C184.2 C185.2 C186.2 C187.2 C188.2 C195.2 C196.2 C197.2 C198.2 C201.2 C202.2 C203.2 C204.2 C205.1 C206.2 C210.2 C263.2 C264.2 C265.2 C266.2 C267.2 C268.2 C269.2 C270.2 C271.2 C272.2 C273.2 C274.2 C275.2 C276.2 C277.2 C278.2 C279.2 C280.2 C281.2 C282.2 C283.2 C291.2 C292.2 C293.2 C295.2 C296.2 CON2.16 CON3.3 EC2.2 FB27.1 FB28.1 H1.1 H2.1 H3.1 M1.7(VSSA_PLL) M1.10(VSS_PLL) M1.15(VSS9) M1.28(VSS8) M1.31(OVSS1) M1.33(VSS7) M1.36(VSS6) M1.40(VSS5) M1.44(VSS4) M1.50(OVSS0) M1.53(VSS3) M1.61(VSS2) M1.64(VSS1) M1.65(DVSS) M2.7(VSSA_PLL) M2.10(VSS_PLL) M2.15(VSS9) M2.28(VSS8) M2.31(OVSS1) M2.33(VSS7) M2.36(VSS6) M2.40(VSS5) M2.44(VSS4) M2.50(OVSS0) M2.53(VSS3) M2.61(VSS2) M2.64(VSS1) M2.65(DVSS) M3.7(VSSA_PLL) M3.10(VSS_PLL) M3.15(VSS9) M3.28(VSS8) M3.31(OVSS1) M3.33(VSS7) M3.36(VSS6) M3.40(VSS5) M3.44(VSS4) M3.50(OVSS0) M3.53(VSS3) M3.61(VSS2) M3.64(VSS1) M3.65(DVSS) M4.7(VSSA_PLL) M4.10(VSS_PLL) M4.15(VSS9) M4.28(VSS8) M4.31(OVSS1) M4.33(VSS7) M4.36(VSS6) M4.40(VSS5) M4.44(VSS4) M4.50(OVSS0) M4.53(VSS3) M4.61(VSS2) M4.64(VSS1) M4.65(DVSS) M5.7(VSSA_PLL) M5.10(VSS_PLL) M5.15(VSS9) M5.28(VSS8) M5.31(OVSS1) M5.33(VSS7) M5.36(VSS6) M5.40(VSS5) M5.44(VSS4) M5.50(OVSS0) M5.53(VSS3) M5.61(VSS2) M5.64(VSS1) M5.65(DVSS) Q7.1 Q7.2 Q7.3 Q8.1 Q8.2 Q8.3 R43.2 R46.2 R50.1 R59.2 R72.1 R75.1 R76.1 R82.1 R83.1 R84.1 R90.1 R93.1 R94.1 R99.2 R101.1 R102.1 R103.1 R107.2 R108.2 R109.2 R110.2 R118.2 R122.1 R123.1 R124.1 R126.2 R127.1 R186.2 R187.2 R188.2 R212.2 R331.1 R332.1 R338.1 T1.1 U2.21(GND) U7.4(GND) U7.9(PAD) U9.2(VSS) U16.1(GND) U29.2(GND) X6.2(GND)
DVDD: C13.1 C14.1 C15.1 C16.1 C17.1 C30.2 C31.2 C42.1 C109.1 C110.1 C111.1 C112.1 C113.1 C114.1 C116.1 C117.1 C118.1 C119.1 C133.1 C134.1 C135.1 C136.1 C137.1 C138.1 C139.1 C140.1 C141.1 C154.1 C155.1 C156.1 C157.1 C158.1 C159.1 C160.1 C161.1 C162.1 C184.1 C185.1 C186.1 C187.1 C188.1 C195.1 C196.1 C197.1 C198.1 C274.1 C275.1 C276.1 C277.1 C278.1 C279.1 C280.1 C281.1 C282.1 EC2.1 L2.2 M1.3(DVDD23) M1.4(DVDD24) M1.5(DVDD25) M1.6(DVDD26) M1.13(DVDD27) M1.14(DVDD28) M1.19(DVDD29) M1.20(DVDD30) M1.21(DVDD31) M1.22(DVDD32) M1.26(DVDD22) M1.27(DVDD21) M1.29(DVDD20) M1.30(DVDD19) M1.34(DVDD18) M1.35(DVDD17) M1.37(DVDD16) M1.38(DVDD15) M1.39(DVDD14) M1.41(DVDD33) M1.42(DVDD13) M1.43(DVDD12) M1.45(DVDD11) M1.46(DVDD10) M1.51(DVDD9) M1.52(DVDD8) M1.54(DVDD7) M1.55(DVDD6) M1.58(DVDD5) M1.59(DVDD4) M1.60(DVDD3) M1.62(DVDD2) M1.63(DVDD1) M2.3(DVDD23) M2.4(DVDD24) M2.5(DVDD25) M2.6(DVDD26) M2.13(DVDD27) M2.14(DVDD28) M2.19(DVDD29) M2.20(DVDD30) M2.21(DVDD31) M2.22(DVDD32) M2.26(DVDD22) M2.27(DVDD21) M2.29(DVDD20) M2.30(DVDD19) M2.34(DVDD18) M2.35(DVDD17) M2.37(DVDD16) M2.38(DVDD15) M2.39(DVDD14) M2.41(DVDD33) M2.42(DVDD13) M2.43(DVDD12) M2.45(DVDD11) M2.46(DVDD10) M2.51(DVDD9) M2.52(DVDD8) M2.54(DVDD7) M2.55(DVDD6) M2.58(DVDD5) M2.59(DVDD4) M2.60(DVDD3) M2.62(DVDD2) M2.63(DVDD1) M3.3(DVDD23) M3.4(DVDD24) M3.5(DVDD25) M3.6(DVDD26) M3.13(DVDD27) M3.14(DVDD28) M3.19(DVDD29) M3.20(DVDD30) M3.21(DVDD31) M3.22(DVDD32) M3.26(DVDD22) M3.27(DVDD21) M3.29(DVDD20) M3.30(DVDD19) M3.34(DVDD18) M3.35(DVDD17) M3.37(DVDD16) M3.38(DVDD15) M3.39(DVDD14) M3.41(DVDD33) M3.42(DVDD13) M3.43(DVDD12) M3.45(DVDD11) M3.46(DVDD10) M3.51(DVDD9) M3.52(DVDD8) M3.54(DVDD7) M3.55(DVDD6) M3.58(DVDD5) M3.59(DVDD4) M3.60(DVDD3) M3.62(DVDD2) M3.63(DVDD1) M4.3(DVDD23) M4.4(DVDD24) M4.5(DVDD25) M4.6(DVDD26) M4.13(DVDD27) M4.14(DVDD28) M4.19(DVDD29) M4.20(DVDD30) M4.21(DVDD31) M4.22(DVDD32) M4.26(DVDD22) M4.27(DVDD21) M4.29(DVDD20) M4.30(DVDD19) M4.34(DVDD18) M4.35(DVDD17) M4.37(DVDD16) M4.38(DVDD15) M4.39(DVDD14) M4.41(DVDD33) M4.42(DVDD13) M4.43(DVDD12) M4.45(DVDD11) M4.46(DVDD10) M4.51(DVDD9) M4.52(DVDD8) M4.54(DVDD7) M4.55(DVDD6) M4.58(DVDD5) M4.59(DVDD4) M4.60(DVDD3) M4.62(DVDD2) M4.63(DVDD1) M5.3(DVDD23) M5.4(DVDD24) M5.5(DVDD25) M5.6(DVDD26) M5.13(DVDD27) M5.14(DVDD28) M5.19(DVDD29) M5.20(DVDD30) M5.21(DVDD31) M5.22(DVDD32) M5.26(DVDD22) M5.27(DVDD21) M5.29(DVDD20) M5.30(DVDD19) M5.34(DVDD18) M5.35(DVDD17) M5.37(DVDD16) M5.38(DVDD15) M5.39(DVDD14) M5.41(DVDD33) M5.42(DVDD13) M5.43(DVDD12) M5.45(DVDD11) M5.46(DVDD10) M5.51(DVDD9) M5.52(DVDD8) M5.54(DVDD7) M5.55(DVDD6) M5.58(DVDD5) M5.59(DVDD4) M5.60(DVDD3) M5.62(DVDD2) M5.63(DVDD1) R36.2 R44.2
DVDD_PLL: C295.1 C296.1 FB22.1 R2.1 R56.1 R62.1 R68.1 R74.1 R211.1 U9.5(VOUT)
GND_MCU: C18.1 C19.1 C20.1 C21.1 C22.2 C23.2 C24.2 C29.2 C33.2 C44.1 C121.2 C294.2 C297.2 CON2.7 CON2.8 FB26.2 GND.1(TP) H4.1 R21.2 R22.2 R35.2 R49.1 R51.1 R60.2 R106.1 R186.1 R187.1 R188.1 SW100.1 SW100.2 U1.8(VSSA) U1.23(VSS_1) U1.35(VSS_2) U1.47(VSS_3) U3.3(GND1) U3.29(GND3) U3.30(GND2) U5.1(VSS)
GND_USB: C25.1 C32.1 C44.2 FB26.1 J1.5(GND) J1.6(GND1) J1.7(GND2) J1.8(GND3) J1.9(GND4)
VBUS: C25.2 C32.2 C297.1 FB25.1 J1.1(VBUS) U3.7(REGIN) U3.8(VBUS)
VCC5V: C29.1 FB25.2 U5.2(VIN) U5.4(VIN1)
VCC12V: C9.1 C10.1 C12.1 C205.2 C206.1 FB23.2 FB24.2 Q6.5 Q6.6 R113.1 U7.2(IN)
VCC33: C22.1 C23.1 C24.1 CON2.1 R33.2 R34.2 R38.2 R39.2 R40.2 R47.2 R48.1 R57.2 R185.1 U1.1(VBAT) U1.9(VDDA) U1.24(VDD_1) U1.36(VDD_2) U1.48(VDD_3) U5.3(VOUT) VCC3V3.1(TP)
VDD: C294.1 R86.1 U3.6(VDD1)
VDD_PLL: C93.1 C94.1 C95.1 C96.1 M1.9(VDD_PLL) R2.2
VDD_PLL2: C126.1 C128.1 C129.1 C130.1 M2.9(VDD_PLL) R56.2
VDD_PLL3: C148.1 C149.1 C150.1 C151.1 M3.9(VDD_PLL) R62.2
VDD_PLL4: C178.1 C179.1 C180.1 C181.1 M4.9(VDD_PLL) R68.2
VDD_PLL5: C268.1 C269.1 C270.1 C271.1 M5.9(VDD_PLL) R74.2
VDDA_PLL: C88.1 C89.1 C91.1 C92.1 M1.8(VDDA_PLL) R1.2
VDDA_PLL2: C120.1 C122.1 C124.1 C125.1 M2.8(VDDA_PLL) R55.2
VDDA_PLL3: C143.1 C144.1 C146.1 C147.1 M3.8(VDDA_PLL) R61.2
VDDA_PLL4: C164.1 C174.1 C176.1 C177.1 M4.8(VDDA_PLL) R67.2
VDDA_PLL5: C263.1 C264.1 C266.1 C267.1 M5.8(VDDA_PLL) R73.2
BOOT: R10.2 U2.1(BOOT)
BOOT0: CON2.5 R34.1 R35.1 U1.44(BOOT0)
BOOT1: CON2.6 R57.1 R60.1 U1.20(PB2)
BTC_BUSY: CON2.14 M1.25(RPT_BUSYN) M2.25(RPT_BUSYN) M3.25(RPT_BUSYN) M4.25(RPT_BUSYN) M5.25(RPT_BUSYN) R28.2 R97.2
BTC_BUSY_1: R28.1 U1.45(PB8)
CFG_N: CON2.12 M1.2(CFG_N) M2.2(CFG_N) M3.2(CFG_N) M4.2(CFG_N) M5.2(CFG_N) R26.1 R79.1
CFG_P: CON2.10 M1.1(CFG_P) M2.1(CFG_P) M3.1(CFG_P) M4.1(CFG_P) M5.1(CFG_P) R24.1 R78.1
CHIP0_ID0: M1.16(CHIP_ID0) R71.1 R76.2
CHIP0_ID1: M1.17(CHIP_ID1) R70.1 R75.2
CHIP0_ID2: M1.18(CHIP_ID2) R69.1 R72.2
CHIP1_ID0: M2.16(CHIP_ID0) R81.1 R84.2
CHIP1_ID1: M2.17(CHIP_ID1) R77.1 R83.2
CHIP1_ID2: M2.18(CHIP_ID2) R82.2 R87.1
CHIP2_ID0: M3.16(CHIP_ID0) R89.1 R94.2
CHIP2_ID1: M3.17(CHIP_ID1) R88.1 R93.2
CHIP2_ID2: M3.18(CHIP_ID2) R90.2 R95.1
CHIP3_ID0: M4.16(CHIP_ID0) R100.1 R103.2
CHIP3_ID1: M4.17(CHIP_ID1) R96.1 R102.2
CHIP3_ID2: M4.18(CHIP_ID2) R101.2 R104.1
CHIP4_ID0: M5.16(CHIP_ID0) R121.1 R124.2
CHIP4_ID1: M5.17(CHIP_ID1) R120.1 R123.2
CHIP4_ID2: M5.18(CHIP_ID2) R122.2 R125.1
CLK: R345.1 U29.1(1A) U29.3(2A)
CLKOUT0: M1.56(CORE_CLKOUT) R99.1
CLKOUT1: M2.56(CORE_CLKOUT) R107.1
CLKOUT2: M3.56(CORE_CLKOUT) R108.1
CLKOUT3: M4.56(CORE_CLKOUT) R109.1
CLKOUT4: M5.56(CORE_CLKOUT) R110.1
CSN: R36.1 U2.15(CSN)
CSP: C31.1 R9.2 U2.16(CSP)
EN: R330.2 U2.14(EN/PSM)
JTCK: JTCK.1(TP) R51.2 U1.37(PA14)
JTDI: JTDI.1(TP) R40.1 U1.38(PA15)
JTDO: JTDO.1(TP) R39.1 U1.39(PB3)
JTMS: JTMS.1(TP) R47.1 U1.34(PA13)
LED1: LED3.A U1.19(PB1)
LED2: LED2.A U1.18(PB0)
LG: R15.1 U2.19(LG)
LTC_BUSY: CON2.13 M1.48(LTC_BUSYN) M2.48(LTC_BUSYN) M3.48(LTC_BUSYN) M4.48(LTC_BUSYN) M5.48(LTC_BUSYN) R27.2 R98.2
LTC_BUSY_1: R27.1 U1.46(PB9)
LTC_EN: M1.47(LTC_EN) M2.47(LTC_EN) M3.47(LTC_EN) M4.47(LTC_EN) M5.47(LTC_EN) R105.1
NJTRST: NJTRST.1(TP) R38.1 U1.40(PB4)
OVDD33: C90.1 C97.1 C107.1 C123.1 C131.1 C132.1 C145.1 C152.1 C153.1 C163.2 C175.1 C182.1 C183.1 C265.1 C272.1 C273.1 C283.1 C291.1 C292.1 CON3.1 M1.32(OVDD1) M1.49(OVDD0) M2.32(OVDD1) M2.49(OVDD0) M3.32(OVDD1) M3.49(OVDD0) M4.32(OVDD1) M4.49(OVDD0) M5.32(OVDD1) M5.49(OVDD0) R30.1 R53.1 R54.1 R69.2 R70.2 R71.2 R77.2 R78.2 R79.2 R81.2 R87.2 R88.2 R89.2 R95.2 R96.2 R97.1 R98.1 R100.2 R104.2 R105.2 R120.2 R121.2 R125.2 R330.1 R331.2 R333.2 R337.2 U9.1(VIN) U9.3(EN) U16.3(VOUT) U29.5(VCC) X6.1(NC) X6.4(VCC)
PA8: C33.1 R29.1 R30.2 U1.29(PA8)
PHASE: C8.2 L2.1 Q6.1 Q6.2 Q6.3 Q7.5 Q7.6 Q8.5 Q8.6 R8.1 R9.1 R117.2 U2.20(PHASE)
PWROK: R48.2 R80.2 U2.3(POK)
RPT_N: CON2.11 M1.23(RPT_N) M2.23(RPT_N) M3.23(RPT_N) M4.23(RPT_N) M5.23(RPT_N) R25.1 R54.2
RPT_P: CON2.9 M1.24(RPT_P) M2.24(RPT_P) M3.24(RPT_P) M4.24(RPT_P) M5.24(RPT_P) R23.1 R53.2
RST: C121.1 CON2.2 R33.1 RST.1(TP) SW100.3 SW100.4 U1.7(NRST)
RSTN: CON2.15 M1.57(RSTN) M2.57(RSTN) M3.57(RSTN) M4.57(RSTN) M5.57(RSTN) R29.2
RTCK: R49.2 RTCK.1(TP)
U_DM: R189.1 U3.5(D-)
U_DP: R190.1 U3.4(D+)
UART1_RX: CON2.3 U1.31(PA10) U3.26(TXD)
UART1_TX: CON2.4 U1.30(PA9) U3.25(RXD)
UART2_RX: R23.2 U1.13(PA3)
UART2_TX: R24.2 U1.12(PA2)
UART3_RX: R25.2 U1.22(PB11)
UART3_TX: R26.2 U1.21(PB10)
UG: R14.1 U2.2(UG)
USB_DM: R183.1 U1.32(PA11)
USB_DP: R184.1 R185.2 U1.33(PA12)
V_5V: C200.2 C201.1 C203.1 C204.1 C293.1 D2.1(C2) D2.3(C1) L3.2 R65.1 R119.1 U16.2(VIN) U16.4(VIN1)
VID0: R85.2 R336.1 U2.12(VID0)
VID1: R332.2 R333.1 U2.13(VID1)
XCLK1: M1.11(XCLKIN) R343.1
XCLK2: M5.11(XCLKIN) R344.1
XCLKOUT: M1.12(XCLKOUT) M2.11(XCLKIN)
XCLKOUT1: M2.12(XCLKOUT) M3.11(XCLKIN)
XCLKOUT2: M3.12(XCLKOUT) M4.11(XCLKIN)
XCLKOUT3: M4.12(XCLKOUT)
XCLKOUT4: M5.12(XCLKOUT)
N31655817: R345.2 X6.3(OUT)
N31664859: R343.2 U29.6(1Y)
N31664886: R344.2 U29.4(2Y)
N31808315: LED2.K R21.1
N31808489: LED3.K R22.1
N31846287: C18.2 R32.1 U1.4(PC15_OSC32_OUT) Y2.2
N31846322: C19.2 R32.2 U1.3(PC14-OSC32_IN) Y2.1
N31847794: C20.2 R37.1 U1.6(PD1/OSCOUT) Y3.3
N31847828: C21.2 R37.2 U1.5(PD0/OSCIN) Y3.1
N31848153: J1.2(DN) R183.2 R189.2
N31925858: J1.3(DP) R184.2 R190.2
N31930344: C40.2 R64.1 U2.7(SET2)
N31930404: C41.2 R63.1 U2.8(SET1)
N31930428: R41.1 R116.1 U2.5(EAP)
N31930452: C43.2 R139.1 U2.9(SET0)
N31930466: C37.2 R42.2 R58.1 R59.1
N31930468: C36.2 C37.1 U2.11(COMP)
N31930472: C36.1 R42.1
N31930529: Q7.4 Q8.4 R15.2 R118.1
N31930549: C34.1 R43.1 R45.1 R58.2 U2.10(FB)
N31930589: R50.2 U2.17(RT)
N31930624: R44.1 R45.2 R52.2
N31930664: C35.2 R41.2 R115.2 U2.4(SS)
N31930682: C39.1 R65.2 U2.18(VCC)
N31930727: C35.1 C38.1 C40.1 C41.1 C43.1 R46.1 R63.2 R64.2 R66.2 R139.2
N31930741: Q6.4 R14.2 R117.1
N31930952: FB23.1 FB24.1 J2.1 T1.2
N31930965: C38.2 R66.1 U2.6(SET3)
N31931230: FB27.2 FB28.2 J2.2 J2.3
N31931306: CON3.2 R336.2 R337.1 R338.2
N31931394: R211.2 R212.1 U9.4(NC)
N31931698: C200.1 R119.2 R126.1 U7.5(FB)
N31931730: C199.2 L3.1 U7.3(SW)
N31931778: C199.1 U7.1(BST)
N31931786: R113.2 U7.7(EN)
N31931792: C202.1 U7.8(SS)
N31931856: C207.1 C210.1 U7.6(COMP)
N31931866: C207.2 R127.2
N31932139: C8.1 D2.2(A) R10.1
N31937949: R80.1 U1.17(PA7)
N31938098: R85.1 U1.15(PA5)
N31946400: R86.2 U3.9(RST-)
N31946531: R106.2 U3.11(SUSPEND#)
N319304001: C11.1 R8.2
N319306121: C34.2 R52.1
N319321511: R115.1 R116.2

Pads without a net: J1 4; U1 2 10 11 14 16 25 26 27 28 41 42 43; U3 1 2 10 12 13 14 15 16 17 18 19 20 21 22 23 24 27 28; Y3 2 4

## Via types
v1: diameter 0.559, hole 0.305, TOP to BOTTOM, 786 vias
v2: diameter 0.813, hole 0.406, TOP to BOTTOM, 113 vias

## Routing (per net, layer and track width the routed paths; a pad name or vN(x,y) marks a point on that pad's centre or on a via; arc(x,y) is an arc through that point)
AVDD_PLL: length 140.1
  TOP w0.508: R55.1 28.3,38.82 28.3,38.74 v1(28.17,38.61) ; v1(25.64,55.01) 25.26,55.4 23.24,55.4 20.52,52.68 20.52,49.62 18.8,47.9 18.8,45.25 19.35,44.7 19.35,39.86 v1(21.29,37.93) ; FB22.2 13.45,39.3 13.13,38.98 v1(13.13,38.74) ; R61.1 36.83,53.27 36.85,53.28 37.22,53.65 v1(37.22,54.99) 37.22,55.69 40.56,59.03 49.76,59.03 50.77,58.02 53.54,58.02 58.52,53.04 58.52,46.03 56.01,43.51 55.3,43.51 53.54,44.63 53.21,44.93 R1.1 ; v1(45.14,21.31) R67.1 ; v1(23.27,32.59) 23.95,32.59 23.98,32.62 24.43,32.62 24.47,32.65 R73.1
  VCC w0.508: v1(28.17,38.61) 25.28,38.61 24.78,38.1 22.15,38.1 21.97,37.93 v1(21.29,37.93) 20.78,38.43 14.12,38.43 13.82,38.74 v1(13.13,38.74) ; v1(45.14,21.31) 45.08,21.31 43.92,20.15 33.63,20.15 33.6,20.18 27.43,20.18 27.41,20.2 25.43,20.2 25.17,20.45 v1(25.17,21.14)
  BOTTOM w0.508: v1(21.29,37.93) 20.19,36.83 20.19,34.8 22.4,32.59 ; v1(37.22,54.99) 36.73,54.51 30.35,54.51 29.2,55.66 26.29,55.66 v1(25.64,55.01) ; 22.4,32.59 22.4,26.85 22.66,26.6 22.66,23.65 v1(25.17,21.14) ; 22.4,32.59 v1(23.27,32.59)
DGND: length 397.5
  TOP w0.152: C264.2 24.48,34.17 24.48,34.56 v1(24.12,34.92) C130.2 ; M4.40 v2(51.92,35.13) ; M1.61 46.1,46.33 ; 33.66,24.57 33.78,24.46 M5.33 ; M1.65 46.59,50.41 ; M1.65 v2(46.63,49.03) v2(47.45,48.21) ; M1.65 46.38,46.74 v1(46.41,46.71) ; M1.65 42.98,50.52 43.01,50.52 ; M1.65 46.38,51.54 45.3,54.39 M1.33 ; v2(39.52,39.48) 41.1,37.9 ; v2(39.52,39.48) v2(38.56,40.44) 36.52,42.48 ; v2(39.52,39.48) 42.39,39.48 v2(42.37,39.55) ; v2(39.52,39.48) 39.52,37.57 ; 41.1,37.9 v2(41.61,37.39) ; 41.1,37.9 41.1,37.84 ; v1(43.33,35.72) 43.38,35.77 43.38,36.28 M2.33 ; M3.7 v2(31.01,48.59) ; C139.2 39.22,31.82 v1(38.57,31.17) 38.57,31.31 C140.2 ; M1.7 v1(48.59,47.97) ; M5.53 v2(35.51,30.53) ; C129.2 v1(26.15,34.92) ; M3.31 24.74,45.9 ; M5.36 v2(34.1,25.86) ; M2.15 36.3,36.83 ; M4.65 50.88,33.86 ; M4.65 51.33,31.92 v1(51.33,31.78) ; M4.65 50.09,32.63 49.44,31.98 45.39,31.98 ; M4.65 49.56,35.13 v2(49.56,35.39) ; M5.10 29.64,30.08 ; 33.45,30.53 33.45,30.48 M5.65 ; 32.89,32.5 32.89,32.49 v2(32.72,32.31) ; M4.36 v2(53.21,34.14) ; 36.92,36.88 38.92,38.88 ; v2(28.73,28.35) 28.52,28.35 ; 29.88,45.72 M3.65 26.96,46.36 26.73,46.31 ; M3.10 v2(30.05,49.2) ; v2(49.28,36.28) 49.28,36.35 ; M2.61 37.72,42.27 ; 48.79,29.54 48.75,29.48 ; 24.7,47.36 25.3,46.99 ; 54.41,33.48 v2(54.1,33.18) ; 73.67,49.91 EC2.2 72.09,49.97 ; C126.2 v1(25.13,34.89) ; 46.53,50.09 v2(46.53,50.09) ; C282.2 29.76,22.67 ; M4.44 v2(50.6,36) ; 47.09,45.64 v1(47.09,46.77) ; 51.4,24.58 v1(51.33,24.51) ; C10.2 v1(29.36,60.25) ; M1.28 v2(46.81,53.27) ; M5.50 v2(36.53,30.03)
  TOP w0.203: 42.12,42.82 v2(42.52,42.42) 42.6,42.51 ; 31.52,30.08 M5.65 ; M2.28 v2(40.92,36.53)
  TOP w0.229: M5.31 v2(33.27,24.95) ; v2(50.67,28.73) 50.36,28.26 M4.15 ; v2(25.35,45.72) 24.99,45.36 24.82,45.36 ; M4.53 v2(48.36,35.46) ; v2(44.91,53.01) 44.9,53.09 44.15,53.7 44.07,53.75 44.02,53.75 43.96,53.8 M1.36 ; M2.31 42.12,36.37 v2(42.11,36.63) ; M3.33 24.64,45.27 ; M5.44 36.27,28.25 M5.65 ; M5.7 30.06,31.29 v2(30.61,30.89) ; M2.10 38.92,38.88 v2(39.52,39.48) ; M4.28 v2(53.39,32.21) ; 54.46,32.92 M4.31 ; M2.44 43.06,40.88 v2(42.55,40.87) ; 48.9,36.66 48.77,36.63 M4.50 ; v2(43.64,48.26) 43.47,48.07 M1.53 ; M5.61 v2(32.72,32.31) ; M3.40 v2(27.13,44) ; M5.28 v2(32.21,25.51) ; v2(46.89,32.8) 46.43,32.95 46.38,32.95 45.7,33.31 M4.61 ; M5.15 v2(28.73,28.35) ; v2(43.37,50.52) 43.01,50.52 42.98,50.55 M1.44 ; 48.75,29.48 M4.10 ; v2(31.83,32.85) 31.98,33.38 M5.64 ; M4.65 47.8,30.13 M4.7 ; v2(45.8,54.03) 45.81,54.03 46.38,54.91 ; M4.33 54.51,33.89 54.51,33.58 54.41,33.48 ; v2(42.49,37.85) 43.06,37.68 M2.36 ; M2.7 35.99,40.08 v2(36.53,40.06) ; 30.9,41.98 v1(30.15,42.5) ; M3.36 v2(25.73,44.76) ; v2(42.37,39.55) 42.75,39.28 M2.40 ; v1(34.65,47.43) M3.64 33.3,47.15 M3.65 ; M3.15 28.84,51.1 28.5,50.56 28.32,50.19 v2(28.32,50.04) ; M1.65 46.53,50.09 ; M1.10 v2(49.25,49) ; M1.15 v2(50.32,50.65) ; M1.50 v1(42.55,48.9) ; M3.53 v2(30.56,43.62) ; M1.40 v2(43.92,51.87) ; M3.61 v2(32.38,46.26) ; v2(34.95,27.22) 35.57,26.82 M5.40 ; M4.64 45.39,31.98 ; M3.44 v2(28.52,43.11) ; M2.50 42.12,42.82 ; M1.64 47.09,45.64 ; M2.64 36.52,42.48 ; v2(40.92,42.4) M2.53
  TOP w0.254: v2(54.1,33.18) 54.2,33.18 54.46,32.92
  TOP w0.381: R72.1 53.05,53.12 v1(53.2,53.27) ; R83.1 33.96,36.33 33.96,36.33 v1(34.11,36.33) ; C12.2 25.03,61.31 ; 35.46,34.93 R110.2 v1(34.98,34.93) ; v1(29.74,35.94) 29.92,35.93 R82.1 ; 51.79,76.48 52.36,76.48 52.94,75.91 54.1,75.91 54.43,75.57 ; R188.2 52.59,22.53 v1(53.8,22.53) ; R84.1 33.45,37.42 v1(32.46,38.41) ; v1(41.76,31.63) 41.76,32.45 C131.2 42.12,32.66 ; 4.3,56.84 4.92,57.87 ; C277.2 31.78,35.03 v1(31.75,35.01) ; v1(25.48,31.19) 25.58,31.09 26.23,31.09 ; v1(43.33,35.72) 43.44,35.72 43.97,35.19 C188.2 ; R109.2 44.87,36.02 44.78,36.02 44.68,35.92 v1(43.99,35.92) ; v1(40.22,29.64) 40.22,29.68 40.36,29.82 40.36,29.85 40.45,29.94 C272.2 40.49,30.32 40.49,31.67 C135.2 ; C281.2 v1(36.12,34.22)
  TOP w0.508: C164.2 44.41,24.89 v1(44.27,24.89) ; C136.2 54.58,49.33 v1(54.74,49.51) ; C112.2 41.06,56.19 v1(41.06,56.86) ; C30.1 31.89,21.94 v1(32.08,22.28) ; C132.2 47.35,42.8 v1(47.57,42.78) ; v1(20.63,27.07) 20.64,27.07 20.64,27.08 C271.2 ; 77.11,44.44 77.02,44.35 R127.1 ; v1(16.28,45.42) 16.85,45.42 16.85,45.42 16.93,45.42 ; C88.2 56.65,46.17 v1(56.92,46) ; v1(51.69,42.75) 51.42,42.75 C111.2 51.71,43.9 C110.2 52.39,44.39 v1(52.83,43.95) ; C153.2 20.56,48.28 v1(20.37,48.44) ; R43.2 v1(7.37,48.16) ; v1(44.27,23.87) 44.41,23.87 C176.2 ; v1(21.93,35.13) 21.93,35.12 21.93,34.95 C263.2 ; v1(20.91,35.13) 20.91,35.12 20.91,34.95 C267.2 ; v1(40.88,45.74) 41.19,45.74 R99.2 ; v1(47.24,40.8) 47.23,40.7 C133.2 ; v1(22.02,50.88) 22.16,50.76 C158.2 ; v1(50.83,24.16) 50.48,24.19 C186.2 ; v1(24.69,31.35) 24.87,31.17 R124.1 ; C270.2 20.65,29.11 20.48,29.11 v1(20.48,29.11) ; v1(46.89,58.35) 46.88,58.34 C116.2 ; v1(28.65,54.72) 28.67,54.7 R94.1 29.39,54.13 29.41,54.16 C279.2 ; C180.2 v1(48.59,24.39) C178.2 ; v1(35.38,22.43) 35.3,22.43 C265.2 ; 71.48,43.06 71.61,43.06 v1(72.16,43.61) 72.23,43.68 C202.2 ; v1(24.14,27.58) 23.93,27.79 23.93,27.82 R123.1 ; C118.2 43.19,44.61 v1(42.34,44.63) ; v1(40.21,45.85) 40.13,45.93 R107.2 ; R122.1 24.03,25.77 v1(24.03,25.33) ; R93.1 24.62,54.12 R90.1 v1(24.61,54.71) ; v1(22.94,35.08) 22.94,34.94 22.94,34.94 C266.2 ; C157.2 33.07,41.92 33.07,41.15 v1(33.05,41.13) 32.72,40.8 C152.2 ; v1(56.19,45.09) 56.03,45.21 C91.2 ; C181.2 v1(48.57,25.49) ; C196.2 52.29,39.84 v1(52.53,39.84) ; C278.2 27.9,33.4 v1(27.38,33.91) 27.38,34.22 27.45,34.28 C128.2 ; v1(11.4,45.72) 11.48,45.65 11.48,45.18 R331.1 ; v1(40.16,55.81) 40.16,55.25 40.44,54.97 ; v1(32.46,38.41) 32.61,38.4 32.61,38.94 C138.2 ; C280.2 26.73,23.02 v1(26.24,23.02) ; U9.2 28.03,57.14 v1(27.78,57.39) ; C159.2 21.42,49.53 v1(21.29,50.09) ; v1(24.77,74.07) 26.01,74.07 26.38,74.44 C9.2 v1(24.81,74.93) ; R59.2 6.12,43.41 6.43,43.72 v1(6.43,43.75) ; R101.1 51.6,26.69 v1(51.54,26.75) ; v1(17.6,51.24) 17.25,50.88 C39.2 ; v1(39.07,48.9) 39.07,48.82 39.36,48.05 ; C155.2 20.86,40.39 20.78,40.39 20.7,40.31 20.17,40.31 v1(20.14,40.34) ; C137.2 34.29,43.01 34.75,43.46 v1(34.8,43.46) 35.23,43.89 R108.2 ; C114.2 45.71,58.26 v1(45.66,58.31) ; v1(34.65,47.43) 34.87,47.2 35.34,47.2 C161.2 ; v1(41.86,22.53) 41.48,22.03 41.48,21.52 v1(40.84,21.77) ; C269.2 20.07,30.41 20.27,30.21 20.27,29.82 v1(20.21,29.76) ; U29.2 57.29,39.16 v1(57.4,39.04) 57.32,39.04 56.93,38.65 56.93,38.11 X6.2 ; v1(32.08,57.53) 32.08,57.53 C151.2 32.08,57.1 32.08,55.89 C148.2 ; v1(20.62,28.09) 20.64,28.09 20.65,28.09 C268.2 ; C122.2 v1(27,40.31) ; C11.2 18.14,58.23 18.36,58.23 v1(18.43,58.29) ; v1(35.48,51.59) 35.48,51.46 35.4,51.38 C162.2 ; C154.2 20.14,41.44 v1(20.14,41.15) ; C123.2 47.24,41.52 47.24,41.71 v1(47.73,42.19) ; v1(51.33,25.65) R102.1 ; v1(53.82,39.07) 53.65,38.87 C197.2 ; C125.2 v1(23.5,38.86) ; C179.2 49.83,22.68 v1(49.83,22.68) ; 54.97,44.54 55.43,44.23 v1(55.7,44.28) ; v1(45.01,23.09) 44.59,22.67 C174.2 ; C156.2 22.47,39.83 21.69,39.83 v1(21.56,39.96) ; C119.2 52.98,55.93 53.08,56.11 v1(53.09,56.11) ; R338.1 v1(9.53,45.7) ; R212.2 v1(23.23,56.84) ; R118.2 v1(15.32,53) ; v1(38.96,54.09) C117.2 ; C145.2 v1(19.53,47.45) ; C141.2 v1(38.66,46.18) ; v1(12.83,44.43) 12.58,44.18 R332.1 ; v1(55.14,51.95) 54.82,51.62 R76.1 ; C295.2 v1(15.1,39.16) ; C296.2 v1(16.37,40) ; R103.1 51.4,24.58 ; v1(54.25,38.23) 54.35,38.23 C184.2 ; v1(30.45,60.1) 30.45,58.43 C283.2 ; C187.2 v1(44.2,27.06) ; R46.2 v1(8.77,60.43) ; 77.91,39.01 77.89,39.03 R126.2 ; C144.2 36.28,55.26 36.28,55.26 36.28,55.75 v1(36.49,55.97) 36.49,55.97 36.29,55.97 C146.2 ; C160.2 22.95,51.94 v1(22.81,52.05) ; C120.2 v1(26.15,39.61) ; R75.1 v1(54.21,52.54) ; v1(39.12,23.65) 39.12,23.5 38.41,22.8 38.14,22.8 ; C147.2 v1(36.55,57) ; v1(32.11,60) 32.11,58.98 32.12,58.98 C150.2 ; C89.2 57.55,47.88 v1(57.73,48.16) ; 29.76,22.67 v1(30.15,22.28) ; C149.2 v1(31.59,55.29) ; v1(53.95,46.36) 53.48,46.36 C94.2 ; C275.2 39.65,24.74 v1(39.65,24.08) ; v1(41.63,57.87) 41.88,57.72 C107.2 ; C134.2 v1(47.23,39.32) ; C124.2 v1(25.13,39.51) ; v1(44.2,25.91) C177.2 ; v1(17.68,49.62) 17.57,49.62 17.42,49.76 R50.1 ; C143.2 v1(36.56,58.06) ; C210.2 v1(76.14,41.78)
  TOP w0.762: 2.69,47.21 CON3.3 ; CON3.3 2.69,49.27 ; CON3.3 3.72,48.24 ; CON3.3 1.66,48.24
  TOP w1.016: v1(25.04,23.78) 25.72,23.78 C274.2
  VCC w0.152: v1(44.2,27.06) 43.17,27.06 42.29,27.94 36.6,27.94 35.87,27.22 v2(34.95,27.22) 34.51,27.22 34.24,27.49 33.55,27.49 33.2,27.49 31.83,27.49 v2(31.78,27.44) 31.06,26.72 29.54,26.72 29.16,27.11 ; v1(44.2,27.06) 44.2,27.56 43.21,28.55 36.6,28.55 36.14,29.01 35.26,29.01 ; v1(44.2,27.06) 44.41,26.85 47.19,26.85 47.7,27.36 48.46,27.36 48.84,26.98 48.84,25.71 48.62,25.49 v1(48.57,25.49) 48.15,25.91 v1(44.2,25.91) 43.47,25.91 42.09,27.28 36.96,27.28 35.51,25.84 34.24,25.84 33.48,26.6 32.74,26.6 32.23,26.09 22.5,26.09 v1(21.54,25.12) 21.54,25.2 21.16,25.58 21.16,26.22 21.23,26.29 21.23,26.3 21.53,26.6 21.54,26.6 21.64,26.7 28.75,26.7 29.16,27.11 ; 35.26,29.01 v2(35,29.26) ; 35.26,29.01 33.86,29.01 ; 29.16,27.11 29.16,27.92 v2(28.73,28.35) 28.73,29.1 27.38,30.45 27.38,30.47 27.25,30.59 27.25,30.92 27.64,31.3 28.02,31.3 29.41,29.9 v2(30.07,29.9) 30.2,29.77 v2(31.32,29.77) 31.78,29.32 31.78,29.32 32.16,28.93 v1(32.64,28.93) 32.72,29.01 33.86,29.01 ; 33.86,29.01 v2(33.86,29.26) ; 34.65,39.48 34.23,39.48 33.93,39.18 33.93,37.95 34.14,37.75 34.85,37.75 35.51,38.41 47.57,38.41 49.35,40.19 v1(50.75,40.19) 51.26,40.19 51.89,40.82 51.89,41.58 51.64,41.84 51.26,41.84 50.62,41.2 49.11,41.2 v1(47.23,39.32) 47.08,39.17 42.85,39.17 v2(42.37,39.55) 42.22,39.3 41.38,39.3 v2(41.22,39.45) 40.95,39.17 39.83,39.17 v2(39.52,39.48) 39.17,39.12 38.07,39.12 v2(37.72,39.48) 37.41,39.17 34.96,39.17 34.65,39.48
  BOTTOM w0.508: v1(49.84,22.68) 49.37,22.68 49.23,22.53
  vias: v1(0.99,38.61) v1(1.17,44.33) v1(1.19,40.64) v1(2.36,49.51) v1(2.74,38.79) v1(3.02,51.59) v1(4.39,39.6) v1(7.11,60.46) v1(9.09,62.49) v1(10.06,39.45) v1(10.08,64.34) v1(10.13,62.51) v1(10.95,60.86) v1(12.4,60.89) v1(15.04,37.63) v1(15.47,30.36) v1(15.57,69.75) v1(16.1,30.33) v1(16.69,69.4) v1(16.79,30.33) v1(17.4,30.36) v1(18.44,70.79) v1(18.54,67.47) v1(18.62,61.01) v1(19.25,65.46) v1(19.51,72.32) v1(19.48,64.14) v1(19.76,61.52) v1(19.89,62.67) v1(20.78,63.17) v1(20.9,73.33) v1(22.53,74.1) v1(23.69,62.66) v1(23.83,74.6) v1(23.83,73.84) v1(23.93,24.13) v1(25.1,22.81) v1(31.45,28.5) v1(32.59,63.45) v1(34.1,28.06) v1(35.23,61.55) v1(35.23,60.89) v1(35.81,61.55) v1(35.81,60.89) v1(36.25,77.07) v1(36.55,60.89) v1(36.6,61.52) v1(37.14,60.84) v1(37.19,61.5) v1(37.49,78.19) v1(37.74,60.84) v1(37.82,61.52) v1(38.35,60.84) v1(38.43,61.5) v1(38.76,78.24) v1(39.04,61.5) v1(38.99,60.84) v1(39.45,37.65) v1(40.03,78.21) v1(41.22,61.37) v1(41.17,60.76) v1(41.55,77.17) v1(41.83,61.42) v1(41.83,60.76) v1(42.44,61.34) v1(42.47,60.71) v1(42.9,77.32) v1(43.1,61.27) v1(43.13,60.68) v1(43.74,61.29) v1(43.74,60.71) v1(44.22,77.17) v1(44.35,60.68) v1(44.4,61.34) v1(45.03,60.68) v1(46.17,77.44) v1(46.43,47.81) v1(47.07,62.46) v1(47.12,61.09) v1(48.64,33.58) v1(48.82,61.04) v1(48.87,62.44) v1(49.66,49.69) v1(49.96,32.74) v1(55.07,22.53) v1(56.44,35.39) v1(57.43,73.61) v1(57.79,33.18) v1(58.75,72.27) v1(59.39,43.74) v1(59.39,42.47) v1(60.4,25.2) v1(60.4,23.04) v1(60.53,27.61) v1(60.66,43.74) v1(60.66,42.47) v1(60.66,33.58) v1(60.66,30.41) v1(60.96,70.72) v1(61.54,68.89) v1(61.8,21.26) v1(61.8,19.61) v1(62.05,41.46) v1(62.05,39.93) v1(62.05,37.77) v1(62.18,44.5) v1(62.18,36.25) v1(62.18,7.93) v1(63.14,69.5) v1(63.32,21.26) v1(63.32,19.74) v1(63.7,41.58) v1(63.7,39.93) v1(63.7,37.77) v1(63.7,36.25) v1(64.59,45.01) v1(64.97,21.26) v1(64.97,19.61) v1(65.1,10.09) v1(65.99,18.34) v1(66.62,45.01) v1(67.01,61.01) v1(67.01,36.71) v1(67.39,17.2) v1(68.02,13.01) v1(68.43,36.74) v1(68.63,64.32) v1(68.63,15.96) v1(68.73,14.79) v1(68.91,45.01) v1(69.19,61.32) v1(69.93,51.24) v1(69.93,49.46) v1(69.93,47.81) v1(69.93,36.76) v1(70,52.91) v1(70.18,63.3) v1(70.18,54.92) v1(70.18,46.41) v1(70.25,42.75) v1(70.27,41.35) v1(70.27,40.16) v1(70.27,39.04) v1(70.34,37.96) v1(70.31,15.55) v1(70.71,62.16) v1(71.2,16.95) v1(71.32,57.71) v1(71.32,45.01) v1(71.4,59.62) v1(71.45,47.68) v1(71.45,46.41) v1(71.54,41.35) v1(71.54,40.16) v1(71.54,39.04) v1(71.58,55.68) v1(71.63,42.55) v1(71.61,37.96) v1(72.34,54.41) v1(72.29,52.76) v1(72.72,47.68) v1(72.72,46.41) v1(73.61,32.44) v1(73.61,30.92) v1(73.74,58.09) v1(73.99,47.68) v1(73.99,46.41) v1(74.37,55.5) v1(74.37,52.63) v1(74.63,53.9) v1(75.26,46.41) v1(75.51,48.06) v1(76.15,52.76) v1(76.53,46.41) v1(76.53,45.14) v1(77.29,49.46) v1(77.29,34.73) v1(77.29,33.33) v1(78.18,44.76) v1(78.18,33.84) v1(78.44,41.33) v1(78.44,39.62) v1(78.44,38.15) v2(26.37,47.17) v2(26.64,45.6) v2(27.51,48.82) v2(27.6,47.18) v2(27.89,45.9) v2(28.22,44.71) v2(28.52,47.81) v2(28.78,49.08) v2(29.06,46.31) v2(29.21,43.92) v2(29.29,45.27) v2(29.92,47.81) v2(30.18,46.66) v2(30.18,44.38) v2(30.38,28.3) v2(30.81,45.52) v2(31.32,46.94) v2(32.23,31.32) v2(32.46,30.03) v2(33.12,26.47) v2(33.6,31.55) v2(34.49,30.41) v2(35.64,27.99) v2(36.78,37.27) v2(37.64,41.28) v2(37.72,42.29) v2(37.69,37.67) v2(38.56,37.65) v2(38.68,36.76) v2(39.37,41.3) v2(40.08,37.01) v2(40.21,37.9) v2(40.34,40.57) v2(41.1,38.15) v2(41.35,41.3) v2(44.12,49.38) v2(45.07,50.97) v2(45.29,49.58) v2(45.29,47.55) v2(45.69,48.49) v2(46.05,52.25) v2(46.3,51.11) v2(47.4,51.59) v2(47.4,31.96) v2(47.7,50.35) v2(47.85,49.25) v2(48.46,51.87) v2(48.46,32.11) v2(48.79,50.73) v2(48.79,29.9) v2(49.1,31.25) v2(50.44,30.28) v2(50.88,34.47) v2(51.38,29.52) v2(52.38,33.46)
DVDD: length 167.3
  TOP w0.152: 35.93,32.68 36.17,32.8 C281.1 36.55,32.45 36.82,32.19 ; 40.51,34.83 40.52,34.84 ; v1(34.34,34.34) 34.21,34.22 34.21,33.15 M5.59 ; 44.4,36.94 44.34,36.88 ; M2.58 38.92,44.14 38.51,44.56 ; v1(44.53,34.32) 44.53,33.79 ; 44.53,33.79 C195.1 ; 44.53,33.79 44.3,33.38 v1(44.15,33.38) ; 37.31,44.25 37.32,44.24 ; M3.59 32.84,45 33.38,44.6 ; 51.68,49.29 51.88,49.37 ; M2.39 44.26,38.88 44.27,38.89 ; 49.35,45.8 48.95,45.83 M1.3 ; M5.14 27.58,29.59 ; v1(33.78,34.42) 34.24,34.88 v1(34.24,34.9) ; 44.17,38.08 44.17,38.08 M2.37 ; 34.03,37.81 34.16,37.68 ; M3.60 33.35,45.17 ; 38.12,35.74 M2.21 38.12,35.21 38.13,35.21 ; v1(44.5,39.73) 44.45,39.68 44.12,39.68 ; 41.53,34.8 41.72,35 ; 49.41,52.97 49.63,53.31 50.04,53.75 50.22,53.98 ; M1.21 50.55,53.74 ; v1(49.88,45.94) 49.34,46.48 M1.5 ; v1(44.96,34.01) 45.16,34.22 45.16,34.27 45.14,34.29 ; M5.6 29.52,32.16 ; v1(37.41,33.46) 37.44,33.43 37.49,33.43 38.28,32.64 39.94,32.64 C135.1 ; 27.35,25.84 26.6,25.84 v1(26.21,25.45) ; 37.11,32.39 v1(37.03,32.31) ; 35.1,40.8 34.75,40.8 ; v1(38.34,25.34) 38.25,25.43 C275.1 ; 40.11,32.74 40.02,32.83 C139.1 ; M2.45 44.52,41.28 v1(44.58,41.33) 44.23,41.68 M2.46 ; M2.43 44.43,40.48 v1(44.55,40.59) ; M4.19 52.71,28.32 53.16,28.35 ; 37.16,44.48 v1(37.31,44.48) ; 34.49,41.61 34.8,41.63 ; 27.53,30.1 27.51,30.13 26.9,30.13 v1(26.87,30.15) ; 34.04,45.14 33.81,44.96 ; 41.33,34.75 41.32,34.75
  TOP w0.203: 31.6,41.96 31.88,41.96 v1(31.98,42.07) ; 25.96,50.4 v1(25.48,50.88) ; M1.46 41.22,50.85 41.1,51.11 ; M5.13 27.64,30.03 ; 52.96,35.24 53.24,35.67 ; 52.47,29.44 52.83,29.19 ; 44.4,37.27 44.39,37.28 M2.35 ; 27.89,41.3 27.89,41.51 ; 38.52,43.22 M2.59 ; 32.57,45.19 32.92,44.96
  TOP w0.229: M2.22 38.52,35.02 38.49,34.91 38.33,34.75 ; 28.96,25.3 29.47,25.66 M5.22 ; 48.04,54.87 48.05,54.53 M1.27 ; 46.99,36.76 47.31,36.58 M4.52 ; M2.60 38.1,44.35 ; 41.99,50.77 41.4,51.13 ; M3.37 25.17,43.18 ; M1.39 42.93,53.09 ; M3.41 26.53,42.28 ; 45.27,32.66 44.63,33.13 C195.1 ; M2.19 37.32,34.64 37.34,34.62 ; 36.82,32.19 36.82,31.95 M5.52 ; M3.26 24.41,48.29 ; M1.58 44.64,46.33 44.44,46.02 44.4,45.9 44.43,45.58 44.46,45.55 ; M4.55 47,35.43 46.55,35.94 ; M3.27 24.44,47.98 ; 44.59,45.26 44.75,45.1 ; 44.59,45.26 44.75,45.54 44.77,45.72 M1.59 ; 44.59,45.26 44.46,45.55 ; 44.75,45.1 M1.60 ; 44.75,45.1 44.46,45.55 ; M4.62 44.91,33.43 ; 47.57,36.91 47.79,36.69 M4.51 ; M3.19 25.88,50.81 v1(25.48,50.88) ; 50.77,49.42 51.23,49.13 51.68,49.29 51.33,49.53 M1.14 ; 27.89,41.3 28.1,41.3 28.21,41.29 M3.46 ; 48.01,55.35 48.22,55.18 48.36,54.79 48.36,54.65 48.33,54.21 48.29,54.18 M1.26 ; 45.72,34.6 45.97,34.6 46.35,34.34 ; M5.35 35.51,24.46 ; M1.52 42.27,47.07 ; M4.54 46.71,36.02 ; M3.22 25.65,49.6 25.48,49.94 25.5,50.35 ; M1.62 46.04,45.42 45.65,44.96 45.59,44.96 45.09,44.91 C118.1 46,44.71 M1.63 ; M3.29 24.15,47.24 23.85,47.55 ; M3.63 34.26,45.98 ; M4.29 55.09,31.58 ; M5.60 33.96,33.4 ; M4.45 51.08,37.52 ; M5.51 37.11,31.68 37.11,32.69 ; 53.72,28.76 53.65,28.76 53.23,29.38 53.22,29.38 52.96,29.55 M4.22 ; M1.6 49.76,46.66 ; M2.55 40.12,44.38 40.36,44.62 v1(40.36,44.76) 40.52,44.6 M2.54 ; M5.62 33.25,33.79 33.25,33.89 v1(33.78,34.42) ; 37.32,44.24 M2.62 ; 36.19,27.37 36.6,27.08 ; M1.20 50.74,53.61 50.84,53.03 M1.19 ; M3.3 33.14,48.94 33.33,49.48 ; 54.92,30.81 54.25,30.69 M4.26 ; M4.43 51.84,37.16 ; M5.63 v1(33.22,34.42) ; M2.6 v1(34.67,40.64) 34.77,40.75 34.77,41 34.75,40.97 34.75,40.8 34.83,40.88 M2.5 35.78,40.88 ; M3.52 31.67,42.42 31.72,42.38 32.21,42.38 32.33,42.5 v1(32.39,42.5) ; M3.35 24.49,43.59 ; M4.46 50.66,37.59 v1(51.03,37.95) ; M2.51 41.72,44.49 v1(41.53,44.68) 41.32,44.48 M2.52 ; 29.18,26.7 28.91,26.27 ; 37.97,27.99 37.66,28.33 M5.46 ; 44.34,36.88 M2.34 ; M1.55 43.46,46.66 43.33,46.51 43.08,46.49 42.95,46.6 M1.54 ; M1.51 41.99,47.35 ; M4.30 55.3,31.88 ; M3.43 27.18,41.84 ; 31.91,49.24 32.12,49.59 32.36,49.86 ; 35.89,25.15 35.45,25.52 M5.37 ; 27.89,41.51 M3.45 ; M1.41 42.39,52.43 ; M4.14 49.34,27.42 49.34,27.14 49.87,26.61 49.87,26.45 49.7,26.62 49.58,26.62 49,27.2 49,27.64 M4.13 ; M4.39 53.16,36.28 ; M1.43 41.86,51.82 ; M1.35 43.69,54.54 ; 35.93,32.68 35.63,32.32 M5.55 ; M3.55 32.47,43.37 v1(32.54,43.06) ; M5.58 34.37,33.05 ; M4.41 52.5,36.71 ; M5.29 31.65,23.93 ; 29.52,26.49 29.26,26.06 ; M5.27 30.94,24.31 ; M2.13 34.16,37.68 34.56,37.28 M2.14 ; M5.45 37.85,27.66 ; M5.41 36.78,26.52 ; M5.26 30.71,24.59 30.66,24.06 ; M4.60 45.44,34.01 ; 46.03,34.07 46.23,33.94 46.41,33.83 ; M2.41 44.12,39.68 ; M5.43 37.29,27.16 ; 36.55,32.45 36.48,32.45 35.97,32.15 35.97,32.11 M5.54 ; M3.58 32.8,44.6 33.39,44.6 33.75,44.96 ; v1(49.88,45.94) 49.88,46.09 48.77,46.89 ; 33.81,44.96 33.75,44.96 ; 33.75,44.96 33.06,45.33 M3.60 ; M3.62 33.99,45.72 ; 40.39,34.78 40.12,35.04 M2.26 ; M3.39 25.91,42.8 ; 28.3,25.73 28.45,26.31 M5.19 ; M5.30 31.98,23.68 ; v1(29.57,33.3) 29.93,33.3 30.31,32.93 M5.3 ; M1.29 47.3,55.05 ; 26.43,50.06 25.96,50.4 ; 41.72,35 M2.30 ; 45.67,29.44 45.71,29.92 45.82,30.08 M4.3 ; M4.34 54.81,35.16 ; M4.37 53.82,35.82 ; M4.27 54.6,30.86 ; M4.35 54.43,35.36 ; 34.8,41.63 M2.3 ; M1.34 43.82,54.84 ; 40.52,34.84 M2.27 ; M5.39 36.32,25.81 ; M3.34 24.13,43.79 ; M3.14 29.52,51.46 ; 51.61,36.11 51.89,36.55 ; M4.6 46.71,29.26 ; M3.54 32.26,43.01 ; M5.34 35.08,24.29 35.33,24.06 ; M3.30 23.93,46.91 23.52,47.43 ; M2.63 37.03,44.2 ; M3.13 29.82,51.34 ; M1.37 43.23,53.8 ; M5.38 36.17,25.48 ; 31.6,41.96 M3.51 ; 41.32,34.75 M2.29 ; M1.30 47.09,55.25
  TOP w0.254: M3.42 26.75,41.96
  TOP w0.381: v1(34.24,34.9) 34.11,35.03 C277.1 ; 34.03,37.81 33.45,38.39 v1(33.35,38.41) ; C281.1 v1(36.09,33.25)
  TOP w0.508: 50.89,53.5 C119.1 ; 50.89,53.5 50.22,53.98 ; 50.89,53.5 50.74,53.61 ; C119.1 51.85,53.84 v1(52.3,53.39) ; C119.1 52.2,53.98 v1(52.5,53.98) ; C31.2 17.03,46.8 v1(17.02,46.79) ; R36.2 v1(15.53,43.49) 14.77,42.73 12.39,42.73 R44.2 ; v1(44.76,44) 44.75,44.14 C118.1 44.75,45.1 ; v1(53.82,50.03) C136.1 52.63,49.57 51.88,49.37 ; C138.1 33.5,38.96 33.37,38.7 v1(33.35,38.41) ; 35.23,45.14 34.04,45.14 ; 42.95,46.6 42.81,46.46 42.39,46.46 41.86,46.49 ; v1(49.35,25.18) 49.45,25.18 49.87,25.59 C186.1 49.87,26.45
  VCC w0.254: 35.64,32.57 34.75,32.57 33.99,33.33 33.99,33.96
  vias: v1(17.96,43.87) v1(22.1,43.72) v1(22.4,44.25) v1(22.94,49.43) v1(23.34,42.93) v1(23.39,49.15) v1(23.37,48.47) v1(23.67,50.68) v1(23.75,43.62) v1(24.51,42.24) v1(24.92,51.24) v1(24.92,42.93) v1(25.17,41.74) v1(25.58,42.37) v1(25.83,41.33) v1(26.16,41.96) v1(26.72,41.58) v1(27,29.49) v1(27.18,24.46) v1(27.53,25.05) v1(28.52,24.97) v1(28.8,32.87) v1(29.26,32.54) v1(29.67,51.85) v1(30.71,24.08) v1(31.17,23.63) v1(31.75,23.35) v1(33.71,51.59) v1(34.14,51.11) v1(34.09,41.28) v1(34.09,40.67) v1(34.34,45.55) v1(34.42,51.67) v1(34.65,41.25) v1(34.85,46.08) v1(34.95,45.39) v1(36.22,24.26) v1(37,24.3) v1(37.31,45.06) v1(37.36,25.02) v1(37.57,32.77) v1(37.6,23.94) v1(37.67,26.78) v1(37.76,25.65) v1(37.92,24.69) v1(38.28,26.5) v1(38.41,45.04) v1(38.41,44.4) v1(38.68,32.59) v1(40.18,52.63) v1(40.69,53.8) v1(40.74,52.3) v1(41.15,32.77) v1(41.25,53.55) v1(41.22,46.64) v1(41.55,47.12) v1(41.63,54.94) v1(42.14,54.69) v1(42.19,53.55) v1(42.47,53.98) v1(44.63,37.8) v1(45.06,39.68) v1(45.16,40.62) v1(45.19,37.8) v1(45.77,37.8) v1(45.8,28.55) v1(45.95,27.89) v1(46.28,57.08) v1(46.36,56.49) v1(46.28,39.68) v1(46.3,37.8) v1(46.46,28.45) v1(47.47,56.77) v1(48.79,44.05) v1(49.89,44.71) v1(50.42,44.43) v1(51.71,37.9) v1(52.07,38.36) v1(52.15,37.27) v1(52.71,36.99) v1(53.31,36.81) v1(53.67,37.32) v1(54.58,28.38) v1(54.79,35.72) v1(54.99,36.45) v1(55.4,31.07) v1(55.45,28.5) v1(55.98,31.53) v1(56.03,30.89) v1(56.01,28.91) v1(56.52,29.37) v1(61.44,55.07) v1(61.44,54.23) v1(61.47,53.47) v1(61.52,52.61) v1(61.49,51.77) v1(62.15,54.26) v1(62.23,55.1) v1(62.2,53.42) v1(62.23,52.61) v1(62.23,51.67) v1(62.87,53.39) v1(62.92,55.07) v1(62.89,54.33) v1(62.89,52.61) v1(62.94,51.74) v1(63.6,55.07) v1(63.6,54.33) v1(63.58,53.42) v1(63.6,52.56) v1(63.68,51.69) v1(64.24,53.34) v1(64.34,55.05) v1(64.29,54.26) v1(64.29,52.56) v1(64.29,51.69) v1(64.9,53.5) v1(64.97,52.58) v1(64.97,51.72)
